# Altium PCB ver061.PcbDoc
Units mm, origin at the board's own origin, x right, y up, seen from the top; angles counter-clockwise.
Board outline 40 x 40 mm, 4 copper layers (ASIG, GND1, GND2, PWR/DSIG), stack 1.569 mm thick; 98 components, 55 nets, 306 pads, 381 vias.
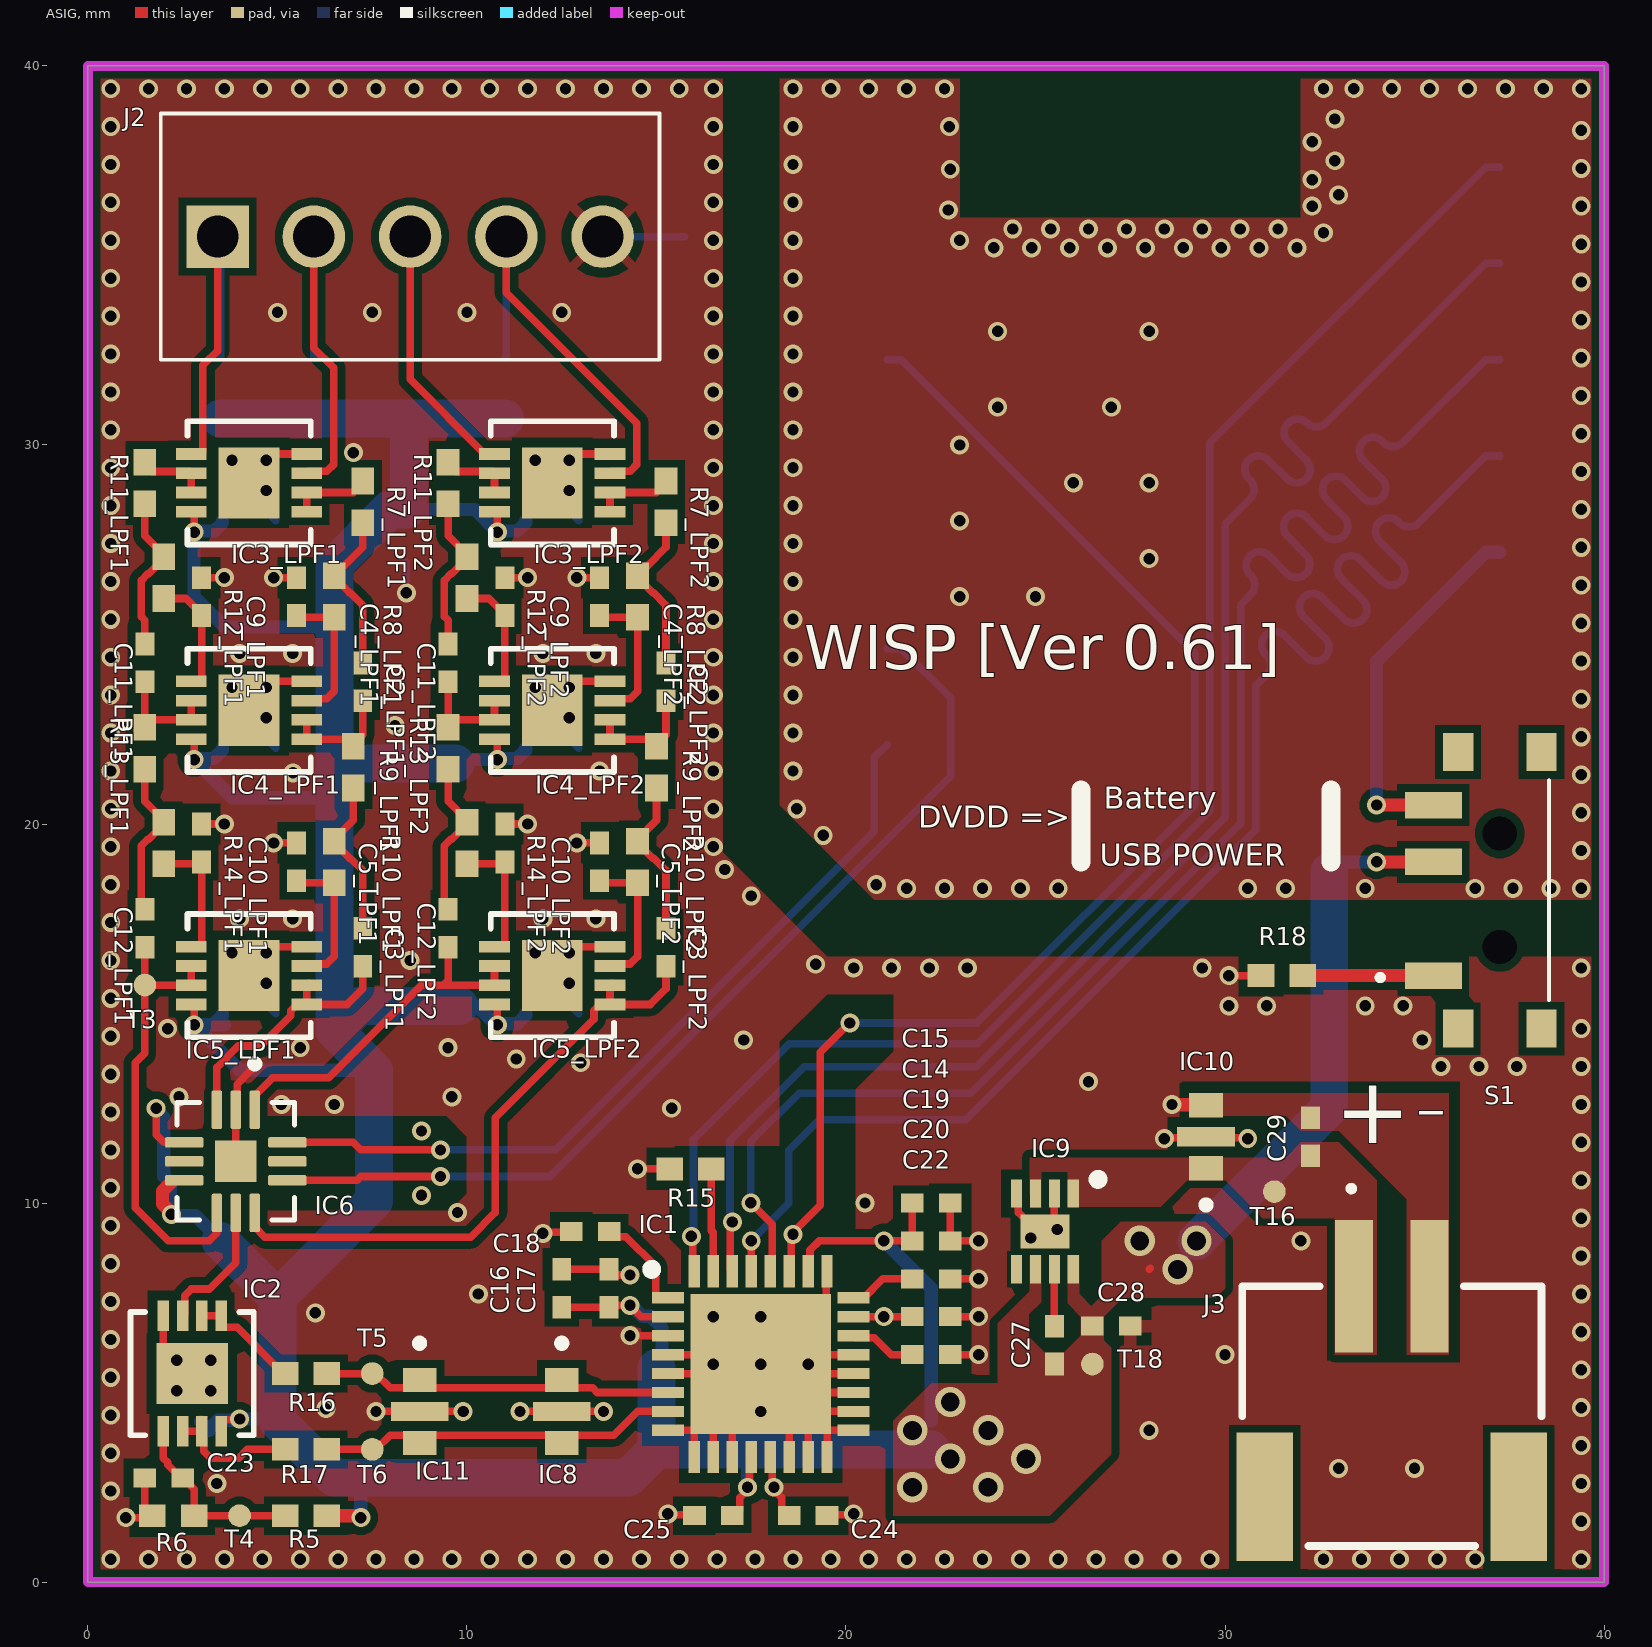
[diagram p0: ASIG view]
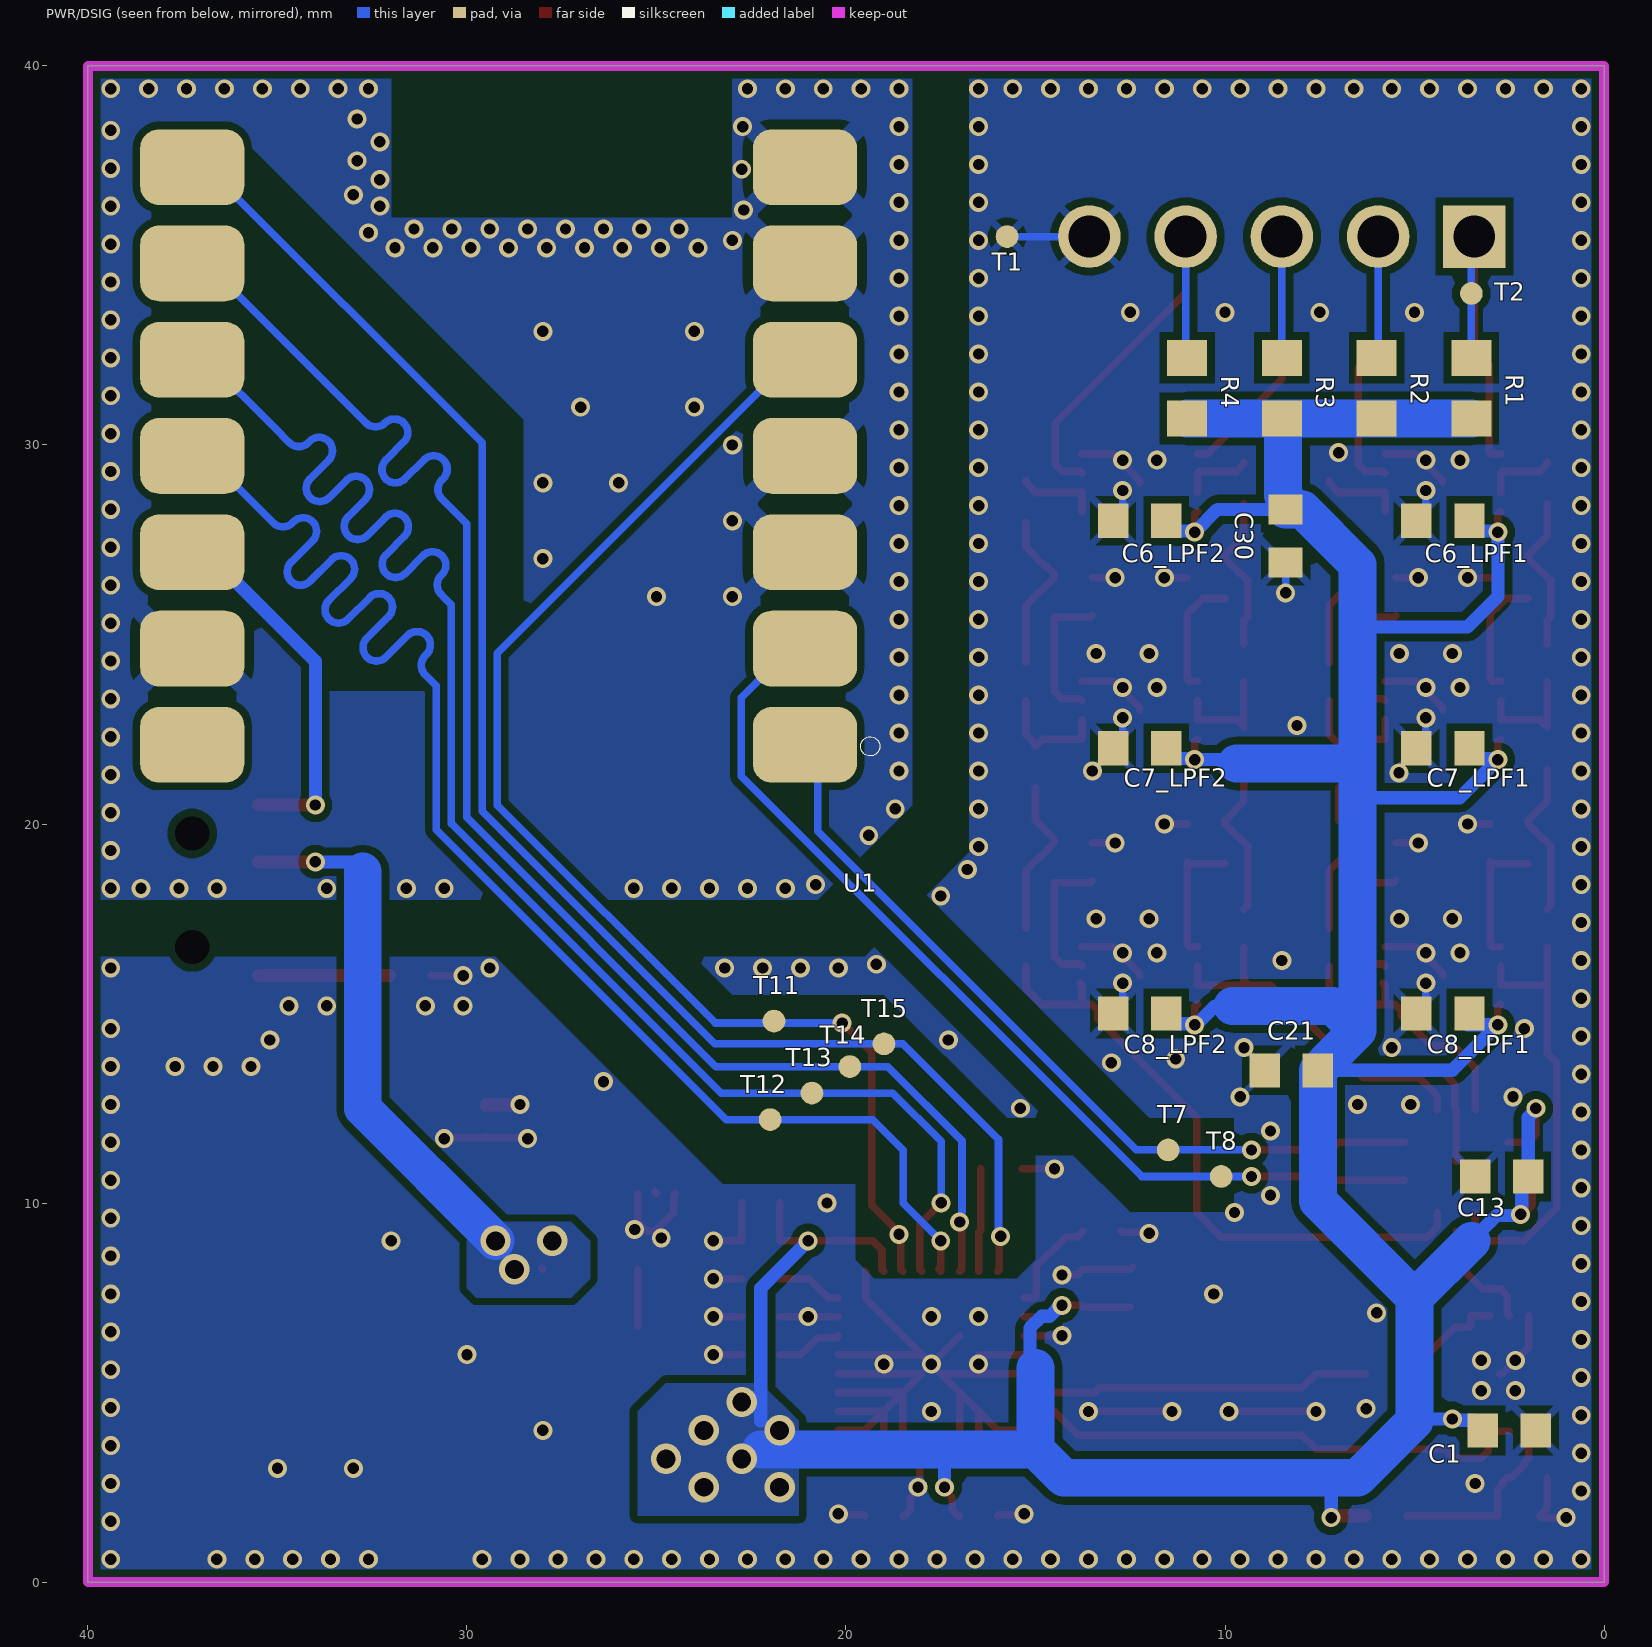
[diagram p1: PWR/DSIG view, seen from below]
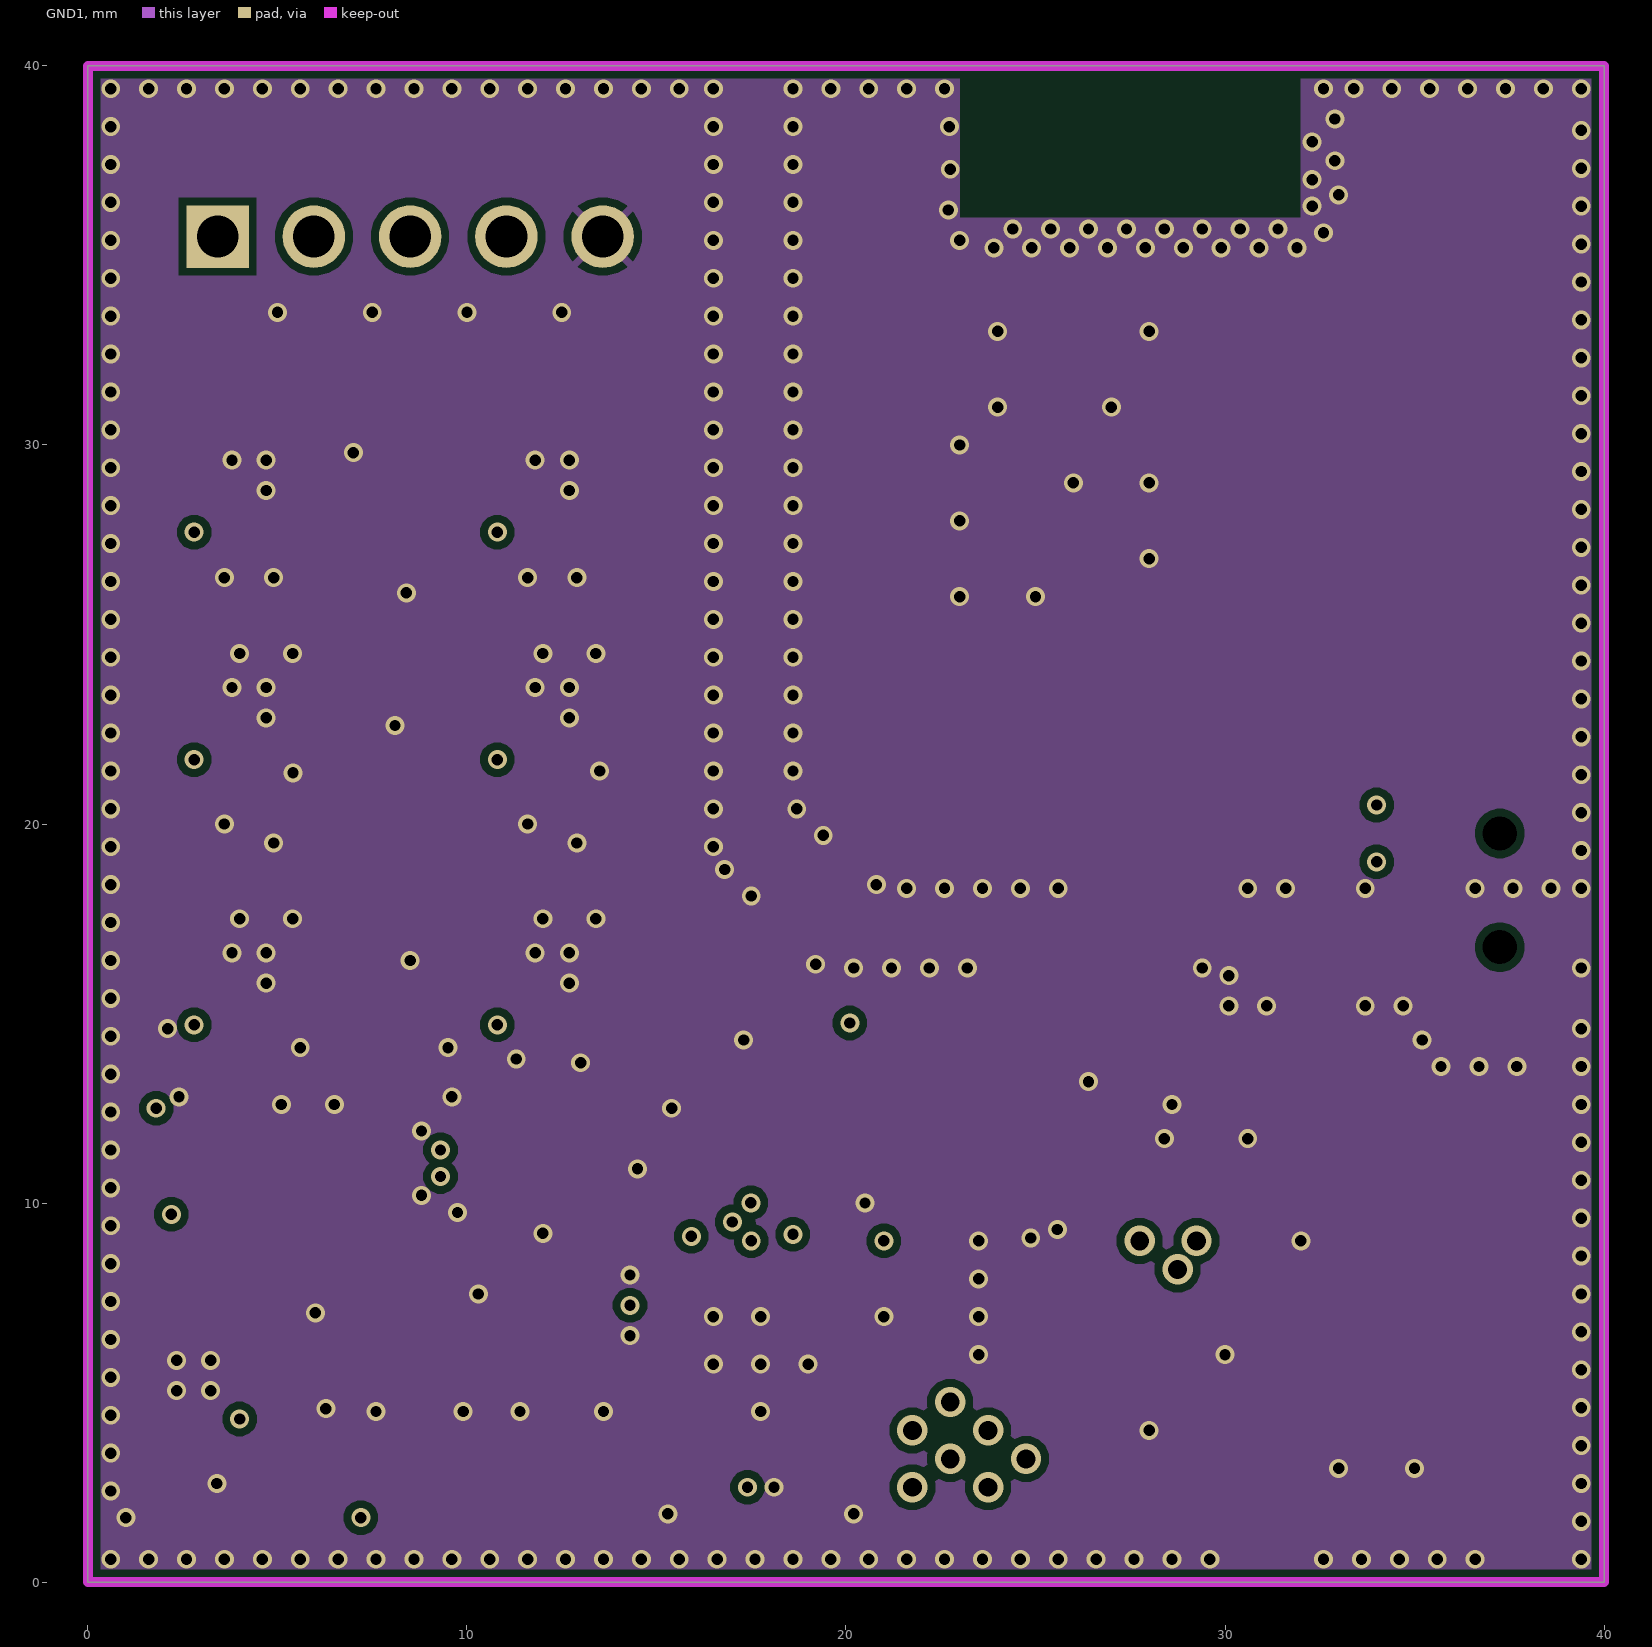
[diagram p2: GND1]
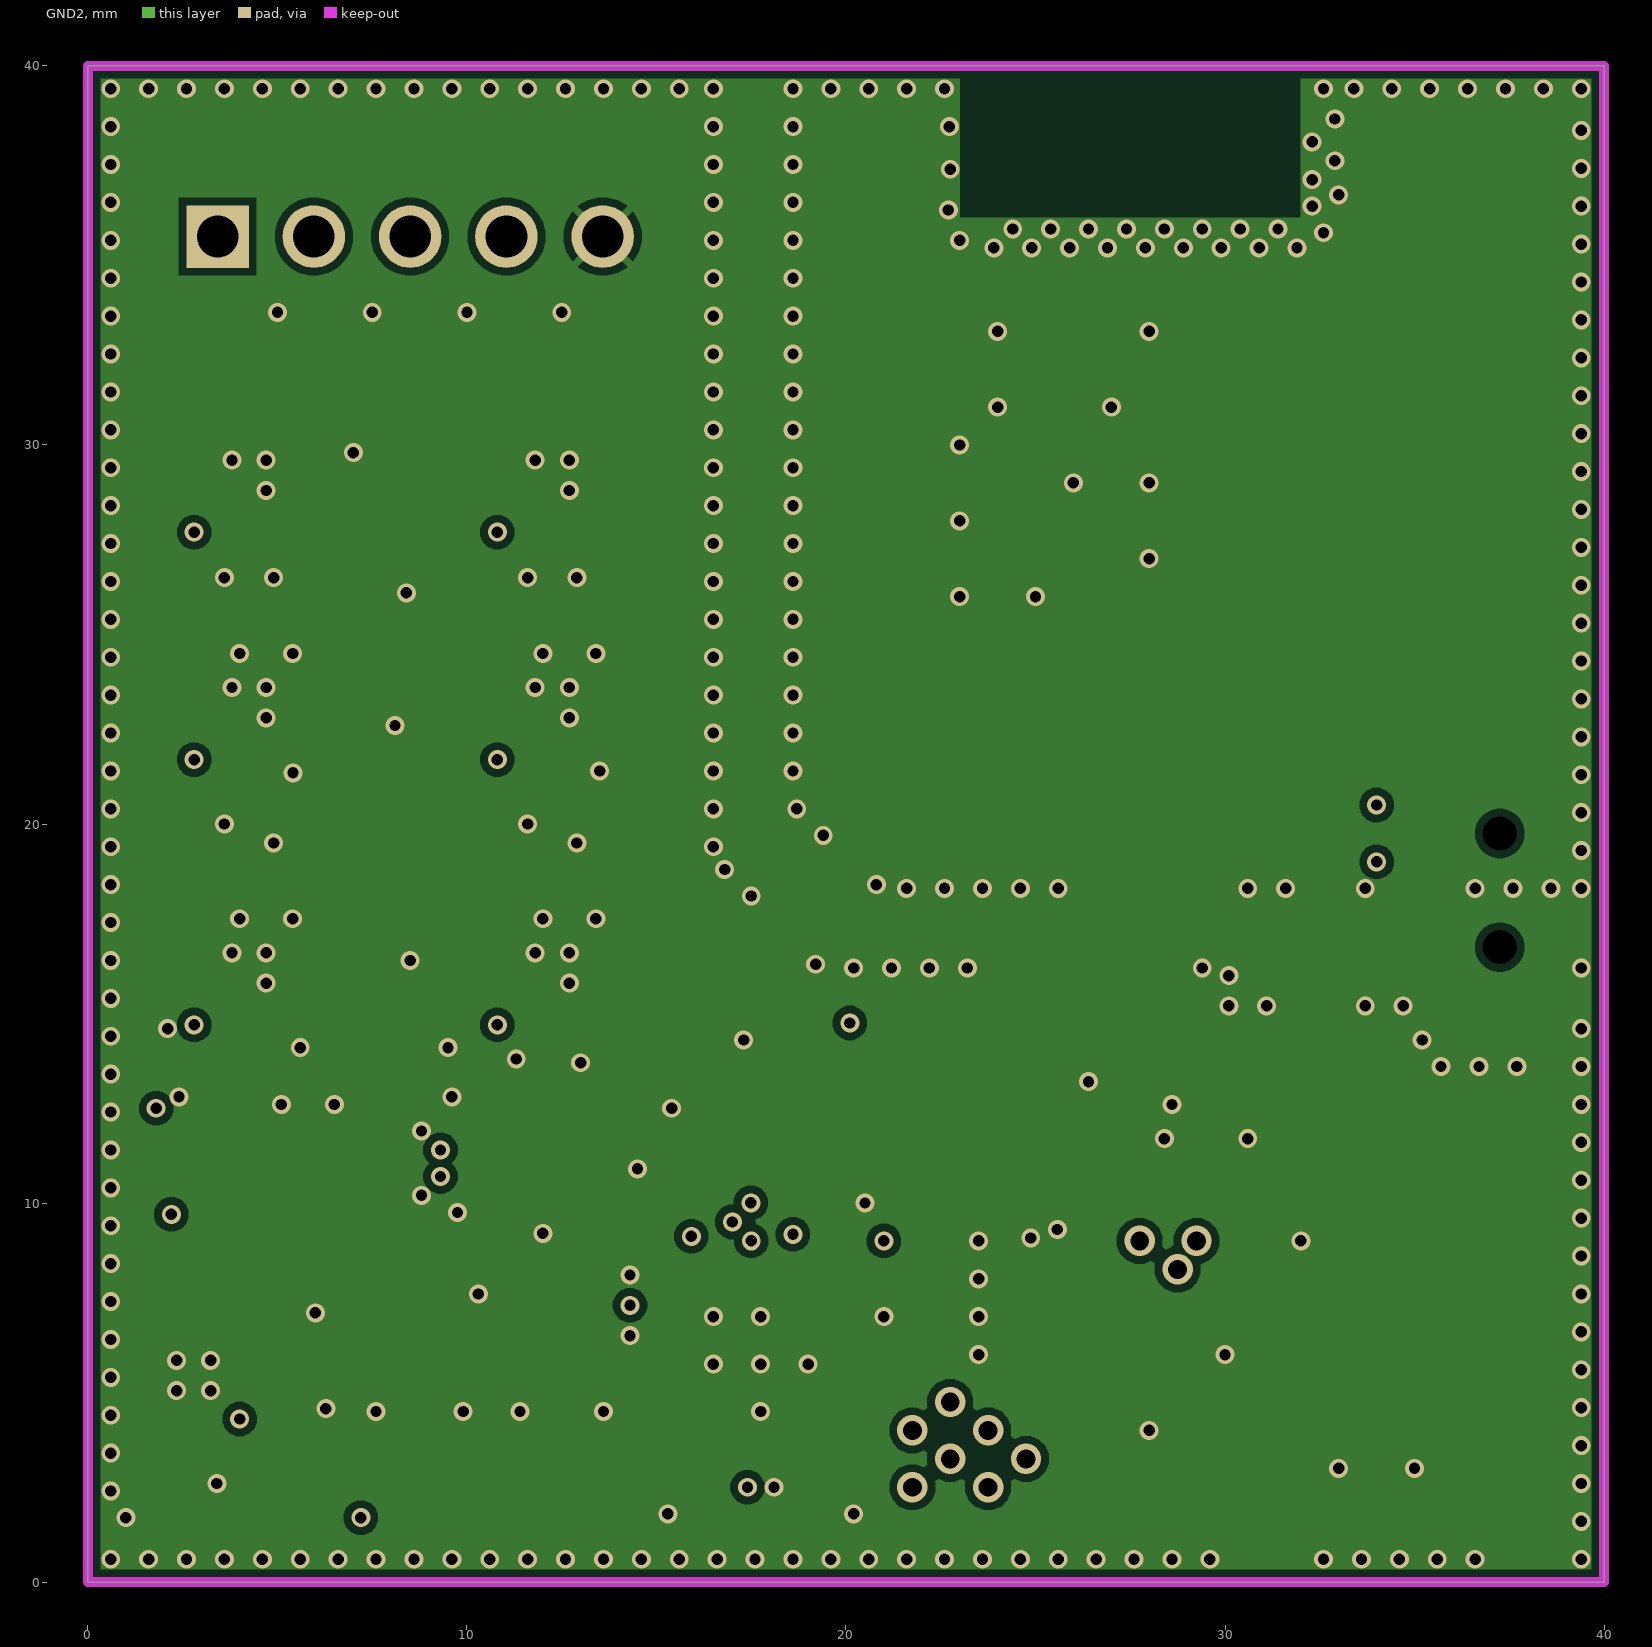
[diagram p3: GND2]
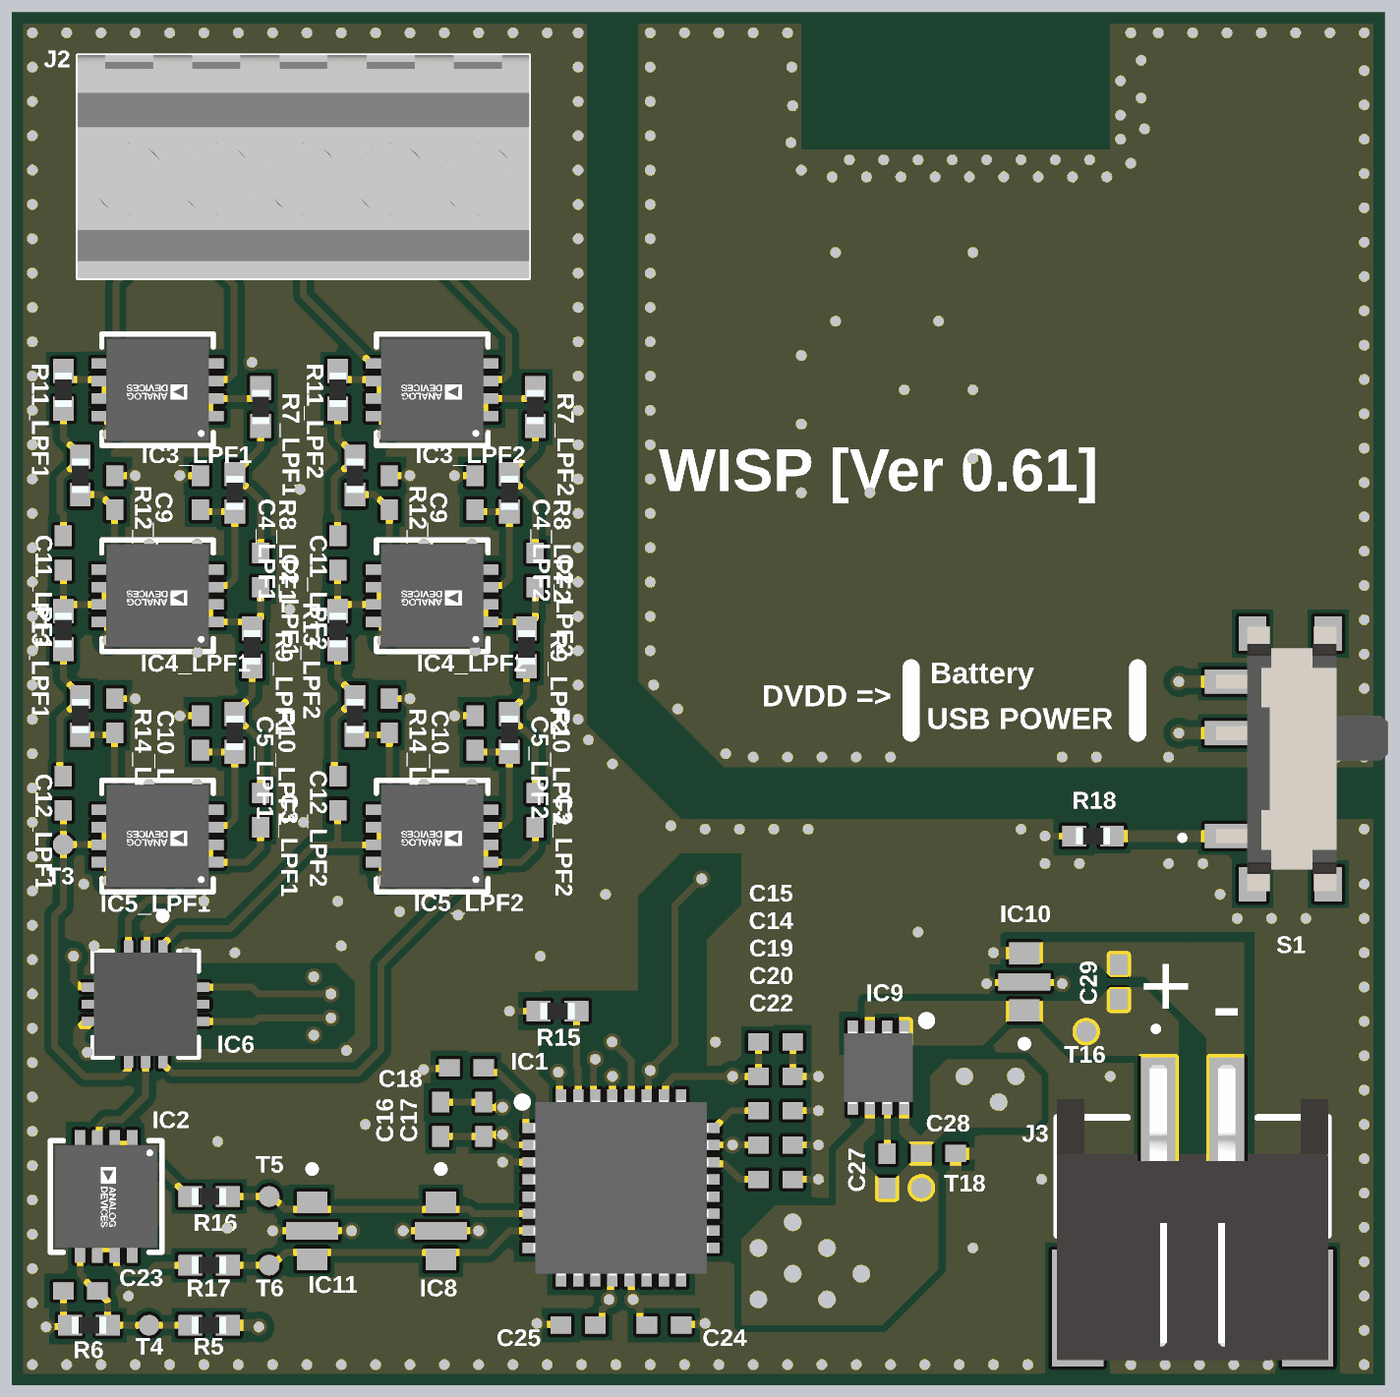
[diagram p4: 3D render of the assembled board from above, using the file's embedded part models]

## Layer stack, top to bottom
Top Solder: solder mask 0.02, Solder Resist, Dk 3.8
ASIG: signal copper 0.035
Dielectric 2: prepreg 0.0994, JLC3313, Dk 4.05
GND1: signal copper 0.0175
Dielectric 1: dielectric 1.265, CORE, Dk 4.6
GND2: signal copper 0.0175
Dielectric 3: prepreg 0.0994, JLC3313, Dk 4.05
PWR/DSIG: signal copper 0.035
Bottom Solder: solder mask 0.02, Solder Resist, Dk 3.8

## Board outline
0,0 40,0 40,40 0,40

## Design rules (kind name [scope] priority, off if disabled: settings)
Clearance Clearance_4 [HasFootprint('500X14W102MV4T') vs HasFootprint('TP_SMT_Round_0.6x0.6')] p1: gap=0.01 ignorepadtopadclearanceinfootprint=TRUE
Clearance Clearance_3 [IsVia and InNet('GND')] p2: gap=0.15 ignorepadtopadclearanceinfootprint=TRUE except(0.01: Arc-Text Track-Text SMDPad-Text THPad-Text Via-Text Fill-Text Poly-Text Region-Text Text-Text)
Clearance Clearance_2 [OnLayer('ASIG') vs HasFootprint('SON50P200X200X80-9N-D')] p3: gap=0.1 ignorepadtopadclearanceinfootprint=TRUE
Clearance Clearance_1 [InNet('AVCC_3V3_raw')] p4: gap=0.2 ignorepadtopadclearanceinfootprint=TRUE except(0.5: Arc-Fill Arc-Poly Arc-Region Track-Fill Track-Poly Track-Region SMDPad-Fill SMDPad-Poly SMDPad-Region THPad-THPad THPad-Fill THPad-Poly THPad-Region Via-Via Via-Fill Via-Poly Via-Region Fill-Fill Fill-Poly Fill-Region Poly-Poly Poly-Region Region-Region)
Clearance [All] p5: gap=0.2 ignorepadtopadclearanceinfootprint=TRUE except(0.01: Arc-Text Track-Text SMDPad-Text THPad-Text Via-Text Fill-Text Poly-Text Region-Text Text-Text)
ComponentClearance [All] p1: gap=0.01 collisioncheckmode=3 verticalgap=0.01 showdistances=FALSE donotcheckwithout3dbody=TRUE
DiffPairsRouting [All] p1: maxlimit=2.5 minlimit=0.1 mostfreqgap=0.75 toplayer_minwidth=0.2 toplayer_maxwidth=0.5 toplayer_prefwidth=0.25 midlayer1_minwidth=0.2 midlayer1_maxwidth=0.5 midlayer1_prefwidth=0.25 midlayer2_minwidth=0.2 midlayer2_maxwidth=0.5 midlayer2_prefwidth=0.25 bottomlayer_minwidth=0.2 bottomlayer_maxwidth=0.5 bottomlayer_prefwidth=0.25 maxuncoupledlength=12.7
HoleSize [All] p1: absolutevalues=TRUE maxlimit=3.5 minlimit=0.3 maxpercent=80.000 minpercent=20.000
MinimumSolderMaskSliver [All] p1: minsoldermaskwidth=0.01
PlaneClearance [All] p1: clearance=0.2
PlaneConnect [All] p1: planeconnectstyle=Direct reliefexpansion=0.5 reliefentries=4 reliefconductorwidth=0.35 reliefairgap=0.2
PolygonConnect PolygonConnect_6 [HasFootprint('MOUDLE16P-SMD-2-54-21X17-8MM') vs IsNamedPolygon('GND_L04_P008')] p1: connectstyle=Relief reliefconductorwidth=0.5 reliefentries=4 polygonreliefangle="45 Angle" airgapwidth=0.254
PolygonConnect PolygonConnect_5 [InComponent('C28') vs InNet('GND')] p2: connectstyle=Relief reliefconductorwidth=0.35 reliefentries=4 polygonreliefangle="90 Angle" airgapwidth=0.254
PolygonConnect PolygonConnect_3 [All vs IsNamedPolygon('GND_L01_P010')] p3: thpad.connectstyle=Relief thpad.reliefconductorwidth=0.254 thpad.reliefentries=4 thpad.polygonreliefangle="45 Angle" thpad.airgapwidth=0.254 smdpad.connectstyle=NoConnect smdpad.reliefconductorwidth=0.254 smdpad.reliefentries=4 smdpad.polygonreliefangle="90 Angle" smdpad.airgapwidth=0.254 via.connectstyle=Direct via.reliefconductorwidth=0.254 via.reliefentries=4 via.polygonreliefangle="90 Angle" via.airgapwidth=0.254
PolygonConnect PolygonConnect_4 [All vs IsNamedPolygon('3V3_L01_P005') Or IsNamedPolygon('GND_L01_P003') Or IsNamedPolygon('NetC29_1_L01_P004')] p4: connectstyle=Direct reliefconductorwidth=0.254 reliefentries=4 polygonreliefangle="90 Angle" airgapwidth=0.254
PolygonConnect PolygonConnect_1 [isVia] p5: connectstyle=Direct reliefconductorwidth=0.254 reliefentries=4 polygonreliefangle="90 Angle" airgapwidth=0.254
PolygonConnect PolygonConnect_2 [InNet('3V3')] p6: connectstyle=Relief reliefconductorwidth=0.35 reliefentries=4 polygonreliefangle="45 Angle" airgapwidth=0.2
PolygonConnect [All] p7: connectstyle=Relief reliefconductorwidth=0.2 reliefentries=4 polygonreliefangle="45 Angle" airgapwidth=0.2
RoomDefinition LPF1 [InComponentClass('LPF1')] p1: confinementstyle=ConfineIn formatcopy=TRUE lockcomponents=FALSE outline 0.5,14.25 8,14.25 8,31 0.5,31
RoomDefinition LPF2 [InComponentClass('LPF2')] p2: confinementstyle=ConfineIn formatcopy=TRUE lockcomponents=FALSE outline 8.5,14.25 16,14.25 16,31 8.5,31
RoutingVias [All] p1: holewidth=0.3 width=0.5 viastyle="Through Hole" minholewidth=0.3 minwidth=0.5 maxholewidth=0.6 maxwidth=1
SilkToSilkClearance [All] p1: silktosilkclearance=0.01
SilkToSolderMaskClearance [IsPad] p1: minsilkscreentomaskgap=0.01 clearancetoexposedcopper=TRUE
SolderMaskExpansion SolderMaskExpansion_1 [IsVia] p1: expansion=0.01 istentingtop=TRUE
SolderMaskExpansion [All] p2: expansion=0.102 istentingtop=FALSE
UnRoutedNet [All] p1: checkbadconnections=TRUE
Width Width_1 [InNet('3V3')] p1: maxlimit=1 minlimit=0.2 preferedwidth=0.35
Width [All] p2: maxlimit=1 minlimit=0.2 preferedwidth=0.2
21 further rules are at their usual default settings.

## Classes and differential pairs
channel class ver061_LPF: LPF1 LPF2
net class out_2[1..2]: out_21 out_22
net class out_1[1..2]: out_11 out_12
net class lpf_in_p2[1..2]: lpf_in_p21 lpf_in_p22
net class lpf_in_p1[1..2]: lpf_in_p11 lpf_in_p12
component class Signal_Analog: C13 C21 C23 C30 IC6 J2 R1 R2 R3 R4 R5 R6 T1 T2 T3 T4
component class Power: C27 C28 C29 IC9 IC10 J3 T16 T18
component class "MCU (SPI_master)": R18 S1 T7 T8 T11 T12 T13 T14 T15 U1
component class LPF2: C2_LPF2 C3_LPF2 C4_LPF2 C5_LPF2 C6_LPF2 C7_LPF2 C8_LPF2 C9_LPF2 C10_LPF2 C11_LPF2 C12_LPF2 IC3_LPF2 IC4_LPF2 IC5_LPF2 R7_LPF2 R8_LPF2 R9_LPF2 R10_LPF2 R11_LPF2 R12_LPF2 R13_LPF2 R14_LPF2
component class LPF1: C2_LPF1 C3_LPF1 C4_LPF1 C5_LPF1 C6_LPF1 C7_LPF1 C8_LPF1 C9_LPF1 C10_LPF1 C11_LPF1 C12_LPF1 IC3_LPF1 IC4_LPF1 IC5_LPF1 R7_LPF1 R8_LPF1 R9_LPF1 R10_LPF1 R11_LPF1 R12_LPF1 R13_LPF1 R14_LPF1
component class "ADC (SPI_slave)": C1 C14 C15 C16 C17 C18 C19 C20 C22 C24 C25 IC1 IC2 IC8 IC11 R15 R16 R17 T5 T6
differential pair Vin: +Vin_P -Vin_N
differential pair Vbuff: +Vbuff_P -Vbuff_N
differential pair Vbuff_1: +Vbuff_1_P -Vbuff_1_N

## Components (designator, comment, footprint, x,y, rotation, side; value= is the part's Value field where it differs from the comment)
C1 "Cap Semi" 1608[0603] 2.5,4 r180 bottom value=100nF
C2_LPF1 "Cap Semi" 0402 7.25,23.75 r270 top value=220nF (schematic designator C2)
C2_LPF2 "Cap Semi" 0402 15.25,23.75 r270 top value=220nF (schematic designator C2)
C3_LPF1 "Cap Semi" 0402 7.25,16.75 r270 top value=100nF (schematic designator C3)
C3_LPF2 "Cap Semi" 0402 15.25,16.75 r270 top value=100nF (schematic designator C3)
C4_LPF1 "Cap Semi" 0402 5.5,26 r270 top value=22nF (schematic designator C4)
C4_LPF2 "Cap Semi" 0402 13.5,26 r270 top value=22nF (schematic designator C4)
C5_LPF1 "Cap Semi" 0402 5.5,19 r270 top value=2.2nF (schematic designator C5)
C5_LPF2 "Cap Semi" 0402 13.5,19 r270 top value=2.2nF (schematic designator C5)
C6_LPF1 "Cap Semi" 1608[0603] 4.25,28 r180 bottom value=100nF (schematic designator C6)
C6_LPF2 "Cap Semi" 1608[0603] 12.25,28 r180 bottom value=100nF (schematic designator C6)
C7_LPF1 "Cap Semi" 1608[0603] 4.25,22 r180 bottom value=100nF (schematic designator C7)
C7_LPF2 "Cap Semi" 1608[0603] 12.25,22 r180 bottom value=100nF (schematic designator C7)
C8_LPF1 "Cap Semi" 1608[0603] 4.25,15 r180 bottom value=100nF (schematic designator C8)
C8_LPF2 "Cap Semi" 1608[0603] 12.25,15 r180 bottom value=100nF (schematic designator C8)
C9_LPF1 "Cap Semi" 0402 3,26 r270 top value=22nF (schematic designator C9)
C9_LPF2 "Cap Semi" 0402 11,26 r270 top value=22nF (schematic designator C9)
C10_LPF1 "Cap Semi" 0402 3,19.5 r270 top value=2.2nF (schematic designator C10)
C10_LPF2 "Cap Semi" 0402 11,19.5 r270 top value=2.2nF (schematic designator C10)
C11_LPF1 "Cap Semi" 0402 1.5,24.25 r270 top value=220nF (schematic designator C11)
C11_LPF2 "Cap Semi" 0402 9.5,24.25 r270 top value=220nF (schematic designator C11)
C12_LPF1 "Cap Semi" 0402 1.5,17.25 r270 top value=100nF (schematic designator C12)
C12_LPF2 "Cap Semi" 0402 9.5,17.25 r270 top value=100nF (schematic designator C12)
C13 "Cap Semi" 1608[0603] 2.7,10.7 r180 bottom value=100nF
C14 "Cap Semi" 0402 22.25,9 r0 top value=100nF
C15 "Cap Semi" 0402 22.25,10 r0 top value=1uF
C16 "Cap Semi" 0402 12.5,7.75 r90 top value=1uF
C17 "Cap Semi" 0402 13.75,7.75 r90 top value=100nF
C18 "Cap Semi" 0402 13.25,9.25 r180 top value=100nF
C19 "Cap Semi" 0402 22.25,8 r0 top value=100nF
C20 "Cap Semi" 0402 22.25,7 r180 top value=100nF
C21 "Cap Semi" 1608[0603] 8.25,13.5 r180 bottom value=1uF
C22 "Cap Semi" 0402 22.25,6 r0 top value=100nF
C23 "Cap Semi" 0402 2,2.75 r0 top value=1uF
C24 "Cap Semi" 0402 19,1.75 r180 top value=100nF
C25 "Cap Semi" 0402 16.5,1.75 r180 top value=100nF
C27 "Cap Semi" 0402 25.5,6.25 r90 top value=10nF
C28 "Cap Semi" 0402 27,6.75 r0 top value=4.7uF
C29 "Cap Semi" 0402 32.25,11.75 r90 top value=4.7uF
C30 "Cap Semi" 1608[0603] 8.4,27.6 r90 bottom value=1uF
IC1 "AD7124-8BBCPZ-RL7" QFN50P500X500X100-33N-D 17.75,5.75 r0 top
IC2 "ADA4051-2ACPZ-R7" DFN300X300X90-9N 2.75,5.5 r270 top
IC3_LPF1 "ADA4051-2ACPZ-R7" DFN300X300X90-9N 4.25,29 r180 top (schematic designator IC3)
IC3_LPF2 "ADA4051-2ACPZ-R7" DFN300X300X90-9N 12.25,29 r180 top (schematic designator IC3)
IC4_LPF1 "ADA4051-2ACPZ-R7" DFN300X300X90-9N 4.25,23 r180 top (schematic designator IC4)
IC4_LPF2 "ADA4051-2ACPZ-R7" DFN300X300X90-9N 12.25,23 r180 top (schematic designator IC4)
IC5_LPF1 "ADA4051-2ACPZ-R7" DFN300X300X90-9N 4.25,16 r180 top (schematic designator IC5)
IC5_LPF2 "ADA4051-2ACPZ-R7" DFN300X300X90-9N 12.25,16 r180 top (schematic designator IC5)
IC6 "MAX4734ETC+T" QFN50P300X300X80-13N 3.9,11.1 r270 top
IC8 "X2Y Cap 100nF" 500X14W102MV4T 12.5,4.5 r270 top
IC9 "MAX38902AATA+T" SON50P200X200X80-9N-D 25.25,9.25 r270 top
IC10 "X2Y Cap 10pF" 500X14W102MV4T 29.5,11.75 r90 top
IC11 "X2Y Cap 10pF" 500X14W102MV4T 8.75,4.5 r270 top
J2 "282834-5" 2828345 3.42,35.5 r0 top
J3 "1769" 1769 34.4,7.8 r0 top
R1 "Res3" RESC1608X55N 3.5,31.5 r90 bottom value=51K
R2 "Res3" RESC1608X55N 6,31.5 r90 bottom value=51K
R3 "Res3" RESC1608X55N 8.5,31.5 r90 bottom value=51K
R4 "Res3" RESC1608X55N 11,31.5 r90 bottom value=51K
R5 "Res3" RESC1005X35N 5.75,1.75 r0 top value=51K
R6 "Res3" RESC1005X35N 2.25,1.75 r0 top value=51K
R7_LPF1 "Res3" RESC1005X35N 7.25,28.5 r90 top value=68K (schematic designator R7)
R7_LPF2 "Res3" RESC1005X35N 15.25,28.5 r90 top value=68K (schematic designator R7)
R8_LPF1 "Res3" RESC1005X35N 6.5,26 r90 top value=1M (schematic designator R8)
R8_LPF2 "Res3" RESC1005X35N 14.5,26 r90 top value=1M (schematic designator R8)
R9_LPF1 "Res3" RESC1005X35N 7,21.5 r90 top value=680K (schematic designator R9)
R9_LPF2 "Res3" RESC1005X35N 15,21.5 r90 top value=680K (schematic designator R9)
R10_LPF1 "Res3" RESC1005X35N 6.5,19 r90 top value=680K (schematic designator R10)
R10_LPF2 "Res3" RESC1005X35N 14.5,19 r90 top value=680K (schematic designator R10)
R11_LPF1 "Res3" RESC1005X35N 1.5,29 r90 top value=68K (schematic designator R11)
R11_LPF2 "Res3" RESC1005X35N 9.5,29 r90 top value=68K (schematic designator R11)
R12_LPF1 "Res3" RESC1005X35N 2,26.5 r90 top value=1M (schematic designator R12)
R12_LPF2 "Res3" RESC1005X35N 10,26.5 r90 top value=1M (schematic designator R12)
R13_LPF1 "Res3" RESC1005X35N 1.5,22 r90 top value=680K (schematic designator R13)
R13_LPF2 "Res3" RESC1005X35N 9.5,22 r90 top value=680K (schematic designator R13)
R14_LPF1 "Res3" RESC1005X35N 2,19.5 r90 top value=680K (schematic designator R14)
R14_LPF2 "Res3" RESC1005X35N 10,19.5 r90 top value=680K (schematic designator R14)
R15 "Res3" RESC1005X35N 15.9,10.9 r180 top value=10K
R16 "Res3" RESC1005X35N 5.75,5.5 r180 top value=1K
R17 "Res3" RESC1005X35N 5.75,3.5 r180 top value=1K
R18 "Res3" RESC1005X35N 31.5,16 r180 top value=10K
S1 "PCM12SMTR" PCM12SMTR 37.25,18.25 r90 top
T1 "TP_SMT" TP_SMT_Round_0.6x0.6 15.75,35.5 r180 bottom
T2 "TP_SMT" TP_SMT_Round_0.6x0.6 3.5,34 r180 bottom
T3 "TP_SMT" TP_SMT_Round_0.6x0.6 1.5,15.75 r0 top
T4 "TP_SMT" TP_SMT_Round_0.6x0.6 4,1.75 r270 top
T5 "TP_SMT" TP_SMT_Round_0.6x0.6 7.5,5.5 r0 top
T6 "TP_SMT" TP_SMT_Round_0.6x0.6 7.5,3.5 r0 top
T7 "TP_SMT" TP_SMT_Round_0.6x0.6 11.5,11.4 r180 bottom
T8 "TP_SMT" TP_SMT_Round_0.6x0.6 10.1,10.7 r180 bottom
T11 "TP_SMT" TP_SMT_Round_0.6x0.6 21.9,14.8 r90 bottom
T12 "TP_SMT" TP_SMT_Round_0.6x0.6 22,12.2 r90 bottom
T13 "TP_SMT" TP_SMT_Round_0.6x0.6 20.9,12.9 r90 bottom
T14 "TP_SMT" TP_SMT_Round_0.6x0.6 19.9,13.6 r90 bottom
T15 "TP_SMT" TP_SMT_Round_0.6x0.6 19,14.2 r90 bottom
T16 "TP_SMT" TP_SMT_Round_0.6x0.6 31.3,10.3 r90 top
T18 "TP_SMT" TP_SMT_Round_0.6x0.6 26.5,5.75 r90 top
U1 "MOUDLE-SEEEDUINO-XIAO-NRF52840-SMD" MOUDLE16P-SMD-2-54-21X17-8MM 20.25,40.21 r0 bottom

## Footprints (in the part's own frame and the unit in brackets; to place one, negate y for a bottom-side part, rotate by r counter-clockwise, add the part's x,y. Pads: shape width x height; smd on the part's side, far side on the other; paste and mask are expansions set on the pad)
0402 [mm] "Chip Capacitor, Body 1.0x0.5mm, IPC High Density"
  rect 0.6x0.5 smd: 1(-0.5,0) 2(0.5,0)
  body extent -0.55,-0.3 0.55,0.3, height 1.3
500X14W102MV4T [mm]
  rect 0.64x0.89 smd: A1(-0.83,0) B1(0.83,0)
  rect 0.51x1.52 smd: G1(0,0)
  silkscreen extent -1.9,-0.1 -1.7,0.1
1608[0603] [mm] "Chip Capacitor, Body 1.6x0.8mm, IPC High Density"
  rect 0.8x0.9 smd: 1(-0.7,0) 2(0.7,0)
  body extent -0.87,-0.48 0.87,0.48, height 1.3
1769 [mm]
  rect 1x3.5 smd: 1(-1,0) 2(1,0)
  rect 1.5x3.4 smd: 3(-3.35,-5.55) 4(3.35,-5.55)
  silkscreen extent -3.95,-6.85 3.95,2.63, body extent -3.95,-7.07 3.95,1.53, height 4.8
2828345 [mm]
  rect 1.65x1.65 hole 1.1: 1(0,0)
  round 1.65 hole 1.1: 2(2.54,0) 3(5.08,0) 4(7.62,0) 5(10.16,0)
  silkscreen extent -1.5,-3.25 11.66,3.25, body extent -1.5,-3.25 11.66,3.25, height 9.7
DFN300X300X90-9N [mil]
  rect 32x12 smd: 1(-60,30) 2(-60,10) 3(-60,-10) 4(-60,-30) 5(60,-30) 6(60,-10) 7(60,10) 8(60,30)
  rect 63x74 smd: 9(0,0)
  silkscreen extent -64,-64 64,64, body extent -59,-59 59,59, height 32
MOUDLE16P-SMD-2-54-21X17-8MM [mm]
  rrect50% 2.75x2 smd: 1(0.835,18.12) 2(0.835,15.58) 3(0.835,13.04) 4(0.835,10.5) 5(0.835,7.96) 6(0.835,5.42) 7(0.835,2.88) 8(17,2.88) 9(17,5.42) 10(17,7.96) 11(17,10.5) 12(17,13.04) 13(17,15.58) 14(17,18.12)
  silkscreen extent -1.14,17.91 -0.64,18.41
PCM12SMTR [mm]
  rect 0.7x1.5 smd: 1(-2.25,1.75) 2(0.75,1.75) 3(2.25,1.75)
  round 0.45 hole 0.9 unplated: MH1(-1.5,0) MH2(1.5,0)
  rect 1x0.8 smd: MP1(-3.65,1.1) MP2(-3.65,-1.1) MP3(3.65,-1.1) MP4(3.65,1.1)
  silkscreen extent -2.9,-1.3 2.9,3.2, body extent -3.85,-2.84 3.85,2.16, height 1.41
QFN50P300X300X80-13N [mm]
  rrect25% 1.01x0.27 smd: 1(-1.36,0.5) 2(-1.36,0) 3(-1.36,-0.5) 7(1.36,-0.5) 8(1.36,0) 9(1.36,0.5)
  rrect25% 0.27x1.01 smd: 4(-0.5,-1.36) 5(0,-1.36) 6(0.5,-1.36) 10(0.5,1.36) 11(0,1.36) 12(-0.5,1.36)
  rect 1.1x1.1 smd paste-0.2: 13(0,0)
  silkscreen extent -2.67,-1.55 1.55,1.55, body extent -1.5,-1.5 1.5,1.5, height 0.8
QFN50P500X500X100-33N-D [mm]
  rect 0.85x0.3 smd: 1(-2.45,1.75) 2(-2.45,1.25) 3(-2.45,0.75) 4(-2.45,0.25) 5(-2.45,-0.25) 6(-2.45,-0.75) 7(-2.45,-1.25) 8(-2.45,-1.75) 17(2.45,-1.75) 18(2.45,-1.25) 19(2.45,-0.75) 20(2.45,-0.25) 21(2.45,0.25) 22(2.45,0.75) 23(2.45,1.25) 24(2.45,1.75)
  rect 0.3x0.85 smd: 9(-1.75,-2.45) 10(-1.25,-2.45) 11(-0.75,-2.45) 12(-0.25,-2.45) 13(0.25,-2.45) 14(0.75,-2.45) 15(1.25,-2.45) 16(1.75,-2.45) 25(1.75,2.45) 26(1.25,2.45) 27(0.75,2.45) 28(0.25,2.45) 29(-0.25,2.45) 30(-0.75,2.45) 31(-1.25,2.45) 32(-1.75,2.45)
  rect 3.7x3.7 smd: 33(0,0)
  silkscreen extent -3,2.38 -2.75,2.62, body extent -2.55,-2.55 2.55,2.55, height 1
RESC1005X35N [mm]
  rect 0.7x0.6 smd: 1(-0.55,0) 2(0.55,0)
  body extent -0.5,-0.25 0.5,0.25, height 0.35
RESC1608X55N [mm]
  rect 0.95x1.05 smd: 1(-0.8,0) 2(0.8,0)
  body extent -0.8,-0.41 0.8,0.41, height 0.55
SON50P200X200X80-9N-D [mm]
  rect 0.75x0.3 smd: 1(-1,0.75) 2(-1,0.25) 3(-1,-0.25) 4(-1,-0.75) 5(1,-0.75) 6(1,-0.25) 7(1,0.25) 8(1,0.75)
  rect 0.9x1.3 smd: 9(0,0)
  silkscreen extent -1.5,1.28 -1.25,1.53, body extent -1.05,-1 1.05,1, height 0.8
TP_SMT_Round_0.6x0.6 [mm]
  round 0.6 smd: 1(0,0)

## Part data
C1 C2_LPF1 C2_LPF2 C3_LPF1 C3_LPF2 C4_LPF1 C4_LPF2 C5_LPF1 C5_LPF2 C6_LPF1 C6_LPF2 C7_LPF1 C7_LPF2 C8_LPF1 C8_LPF2 C9_LPF1 C9_LPF2 C10_LPF1 C10_LPF2 C11_LPF1 C11_LPF2 C12_LPF1 C12_LPF2 C13 C14 C15 C16 C17 C18 C19 C20 C21 C22 C23 C24 C25 C27 C28 C29 C30: "Capacitor (Semiconductor SIM Model)", LatestRevisionDate=29-May-2009, LatestRevisionNote="IPC-7351 Footprint Added.", PackageDescription="Chip Capacitor", PackageReference=C1206, Published=8-Jun-2000, Publisher="Altium Limited"
IC1: "Integrated Circuit", Manufacturer_Name="Analog Devices", Mouser Part Number=584-AD7124-8BBCPZRL7, Arrow Part Number=AD7124-8BBCPZ-RL7, Arrow Price/Stock=https://www.arrow.com/en/products/ad7124-8bbcpz-rl7/analog-devices?region=nac, Datasheet Link=https://www.analog.com/media/en/technical-documentation/data-sheets/ad7124-8.pdf, Height=1mm, Manufacturer_Part_Number=AD7124-8BBCPZ-RL7, Mouser Price/Stock=https://www.mouser.co.uk/ProductDetail/Analog-Devices/AD7124-8BBCPZ-RL7?qs=wUXugUrL1qzAxcMt7nmw0w%3D%3D
IC2 IC3_LPF1 IC3_LPF2 IC4_LPF1 IC4_LPF2 IC5_LPF1 IC5_LPF2: "Integrated Circuit", Manufacturer_Name="Analog Devices", Mouser Part Number=584-ADA4051-2ACPZ-R7, Arrow Part Number=ADA4051-2ACPZ-R7, Arrow Price/Stock=https://www.arrow.com/en/products/ada4051-2acpz-r7/analog-devices, Manufacturer_Part_Number=ADA4051-2ACPZ-R7, Mouser Price/Stock=https://www.mouser.co.uk/ProductDetail/Analog-Devices/ADA4051-2ACPZ-R7?qs=BpaRKvA4VqFJoopj8kXVMQ%3D%3D
IC6: "Integrated Circuit", Manufacturer_Name="Analog Devices", Mouser Part Number=700-MAX4734ETCT, Datasheet Link=https://datasheets.maximintegrated.com/en/ds/MAX4734.pdf, Height=0.8mm, Manufacturer_Part_Number=MAX4734ETC+T, Mouser Price/Stock=https://www.mouser.co.uk/ProductDetail/Analog-Devices-Maxim-Integrated/MAX4734ETC%2bT?qs=LHmEVA8xxfYMT3DtZOqchA%3D%3D
IC8 IC10 IC11: library part 500X14W102MV4T, "Integrated Circuit", Manufacturer_Name="JOHANSON TECHNOLOGY", Mouser Part Number=605-500X14W102MV4T, Datasheet Link=https://www.johansondielectrics.com/downloads/x2y-filter-and-decoupling-capacitors.pdf, Height=0.66mm, Manufacturer_Part_Number=500X14W102MV4T, Mouser Price/Stock=https://www.mouser.co.uk/ProductDetail/Johanson-Dielectrics/500X14W102MV4T?qs=yCnrNFeXz%252Bg%252BGvc939b0KQ%3D%3D
IC9: "Integrated Circuit", Manufacturer_Name="Analog Devices", Mouser Part Number=700-MAX38902AATA+T, Datasheet Link=https://media.digikey.com/pdf/Data%20Sheets/Maxim%20PDFs/MAX38902A_B_C_D_Rev4_12-6-18.pdf, Height=0.8mm, Manufacturer_Part_Number=MAX38902AATA+T, Mouser Price/Stock=https://www.mouser.co.uk/ProductDetail/Maxim-Integrated/MAX38902AATA%2bT?qs=rrS6PyfT74ceu65lHXtPmw%3D%3D
J2: "Connector", Manufacturer_Name="TE Connectivity", Mouser Part Number=571-282834-5, Arrow Part Number=282834-5, Arrow Price/Stock=https://www.arrow.com/en/products/282834-5/te-connectivity?region=nac, Datasheet Link=https://www.te.com/commerce/DocumentDelivery/DDEController?Action=showdoc&DocId=Customer+Drawing%7F282834%7FC1%7Fpdf%7FEnglish%7FENG_CD_282834_C1.pdf%7F282834-5, Height=10.3mm, Manufacturer_Part_Number=282834-5, Mouser Price/Stock=https://www.mouser.co.uk/ProductDetail/TE-Connectivity/282834-5?qs=A%252Bip%252BNCYi6PY1Kyrkp4b4w%3D%3D
J3: "Connector", Manufacturer_Name=Adafruit, Mouser Part Number=485-1769, Arrow Part Number=1769, Arrow Price/Stock=https://www.arrow.com/en/products/1769/adafruit-industries?region=nac, Datasheet Link=https://cdn-shop.adafruit.com/datasheets/17311.pdf, Manufacturer_Part_Number=1769, Mouser Price/Stock=https://www.mouser.co.uk/ProductDetail/Adafruit/1769?qs=GURawfaeGuBbgoGtf2XstA%3D%3D
R1 R2 R3 R4 R5 R6 R7_LPF1 R7_LPF2 R8_LPF1 R8_LPF2 R9_LPF1 R9_LPF2 R10_LPF1 R10_LPF2 R11_LPF1 R11_LPF2 R12_LPF1 R12_LPF2 R13_LPF1 R13_LPF2 R14_LPF1 R14_LPF2 R15 R16 R17 R18: "Resistor", LatestRevisionDate=29-May-2009, LatestRevisionNote="IPC-7351 Footprint Added.", PackageDescription="Chip Resistor", PackageReference=J1-0603, Published=8-Jun-2000, Publisher="Altium Limited"
S1: "Switch", Manufacturer_Name="C & K COMPONENTS", Mouser Part Number=611-PCM12SMTR, Arrow Part Number=PCM12SMTR, Arrow Price/Stock=https://www.arrow.com/en/products/pcm12smtr/ck?region=nac, Datasheet Link=https://www.ckswitches.com/media/1424/pcm.pdf, Height=1.4mm, Manufacturer_Part_Number=PCM12SMTR, Mouser Price/Stock=https://www.mouser.co.uk/ProductDetail/CK/PCM12SMTR?qs=mfFuHy8STfL3qrPSfCHA7w%3D%3D
U1: Package=MOUDLE16P-SMD-2.54-21X17.8MM, DeviceName=-SMD, DeviceSetName=MOUDLE-SEEEDUINO-XIAO-NRF52840, GateName_1=G$1, LibraryName=Seeed-Studio-XIAO-nRF52840-footprint-eagle, SymbolName_1=MOUDLE-SEEEDUINO-XIAO-NRF52840

## Via types
v1: diameter 0.5, hole 0.3, ASIG to PWR/DSIG, tented both sides, 371 vias
v2: diameter 0.8, hole 0.5, ASIG to PWR/DSIG, tented both sides, 10 vias

## Nets (pads, with @x,y where several pads share a name; then routed paths per layer and width w, separated by ;. In a path a pad name is that pad's centre, name@x,y a point inside that pad or via, vN(x,y) a via of type N, cw(c..) or ccw(c..) an arc to the next point about the centre after c; other vN are vias at no path point)
3V3: C1.1 C6_LPF1.2 C6_LPF2.2 C7_LPF1.2 C7_LPF2.2 C8_LPF1.2 C8_LPF2.2 C13.2 C14.1 C15.1 C16.1 C17.1 C21.2 C25.1 C27.1 C28.1 C30.2 IC1.2 IC1.12 IC1.26 IC2.8 IC3_LPF1.8 IC3_LPF2.8 IC4_LPF1.8 IC4_LPF2.8 IC5_LPF1.8 IC5_LPF2.8 IC6.4 IC6.6 IC9.6 IC9.8 R1.1 R2.1 R3.1 R4.1 R5.2 S1.2 T18.1 | length 139.6
  ASIG w0.2: v1(1.8,12.5) 1.8,11.8 2,11.6 IC6.4 ; IC5_LPF1.8 2.748,15.238 2.8,15.186 v1(2.8,14.7) ; IC4_LPF1.8 2.748,22.238 2.8,22.186 v1(2.8,21.7) ; IC3_LPF1.8 2.748,28.238 2.8,28.186 v1(2.8,27.7) ; IC2.8 3.512,4.23 3.564,4.282 3.982,4.282 v1(4,4.3) ; IC5_LPF2.8 10.748,15.238 10.8,15.186 v1(10.8,14.7) ; IC4_LPF2.8 10.748,22.238 10.8,22.186 v1(10.8,21.7) ; IC3_LPF2.8 10.748,28.238 10.8,28.186 v1(10.8,27.7) ; C16.1 C17.1 13.8,7.3 v1(14.3,7.3) 14.6,7 IC1.2 ; C25.1 17.05,1.75 17.2,1.9 17.2,2.219 17.4,2.419 v1(17.4,2.5) 17.45,2.55 17.45,3.25 IC1.12 ; IC1.26 19.05,8.25 19.05,8.749 19.301,9 v1(21,9) C14.1 C15.1 ; 28,8.25 28.025,8.275
  ASIG w0.35: v1(1.8,12.5) v1@1.829,12.471 ; v1@2.171,9.729 v1(2.2,9.7) 2.2,9.741 1.965,9.975 1.965,10.315 IC6.6@2.21,10.56 ; R5.2 7.109,1.75 7.159,1.7 v1(7.2,1.7) ; v1(34,19) S1.2
  PWR/DSIG w0.2: 17.4,3.4 17.5,3.5
  PWR/DSIG w0.35: v1(1.8,12.5) 1.8,12.459 2,12.259 C13.2 2.171,10.529 2.171,9.729 v1(2.2,9.7) 2.229,9.671 2.829,9.671 3,9.5 3.5,9 ; C1.1@2.975,4.225 C1.1 3.2,4.046 3.425,4.271 3.971,4.271 v1(4,4.3) 4.95,4.3 5,4.25 ; C8_LPF1.2@3.325,14.729 3.55,14.954 C8_LPF1.2 ; C7_LPF1.2 3.55,21.954 3.325,21.729 2.829,21.729 v1(2.8,21.7) 3.805,20.695 6.5,20.695 ; C6_LPF1.2 3.55,27.954 3.325,27.729 2.829,27.729 v1(2.8,27.7) 2.8,26 3.6,25.2 6.4,25.2 6.5,25.1 ; C8_LPF1.2@3.6,14.7 3.325,14.7 v1(2.8,14.7) 4,13.5 C21.2 7.55,13.55 7.325,13.775 7.145,13.775 7.12,13.8 ; v1(7.2,1.7) 7.2,2.7 7.25,2.75 ; C30.2 10.2,28.3 v1(10.8,27.7) 10.829,27.729 11.325,27.729 11.55,27.954 C6_LPF2.2 ; 9.7,21.6 9.8,21.7 v1(10.8,21.7) 10.829,21.729 11.325,21.729 11.55,21.954 C7_LPF2.2 ; 9.8,15.2 10.259,15.2 10.759,14.7 v1(10.8,14.7) 10.829,14.729 11.325,14.729 11.55,14.954 C8_LPF2.2 ; v1(14.3,7.3) 14.341,7.3 14.63,7.011 14.838,7.011 15.146,6.703 15.146,5.796 15,5.65 ; v1(17.4,2.5) 17.4,3.4 ; v1(21,9) 22.25,7.75 22.25,4.25 ; 32.75,18.75 33,19 v1(34,19)
  PWR/DSIG w1: 3.5,9 5,7.5 ; R1.1 R2.1 R3.1 ; 9.7,21.6 6.5,21.6 ; 9.8,15.2 7.15,15.2 6.5,14.55 ; R4.1 R3.1 ; 15,5.65 15,3.5 ; 22.25,3.5 17.5,3.5 15,3.5 ; v2(29.25,9) 32.75,12.5 32.75,18.75 ; 5,7.5 7.55,10.05 C21.2 7.185,13.865 6.5,14.55 ; 5,7.5 5,4.25 6.5,2.75 7.25,2.75 14.25,2.75 15,3.5 ; 6.5,14.55 6.5,20.695 6.5,21.6 ; 6.5,21.6 6.5,25.1 6.5,26.84 7.96,28.3 C30.2 8.4,28.6 8.475,28.675 8.475,30.675 R3.1
  other v2: 21.75,2.5 23.75,2.5 22.75,3.25 24.75,3.25 21.75,4 23.75,4 22.75,4.75 28.75,8.25 27.75,9
GND: C1.2 C4_LPF1.1 C4_LPF2.1 C5_LPF1.1 C5_LPF2.1 C6_LPF1.1 C6_LPF2.1 C7_LPF1.1 C7_LPF2.1 C8_LPF1.1 C8_LPF2.1 C9_LPF1.1 C9_LPF2.1 C10_LPF1.1 C10_LPF2.1 C13.1 C14.2 C15.2 C16.2 C17.2 C18.2 C19.2 C20.1 C20.2 C21.1 C22.2 C23.1 C24.1 C24.2 C25.2 C28.2 C29.2 C30.1 IC1.3 IC1.4 IC1.5 IC1.8 IC1.9 IC1.10 IC1.11 IC1.13 IC1.14 IC1.15 IC1.16 IC1.17 IC1.18 IC1.19 IC1.20 IC1.21 IC1.23 IC1.25 IC1.33 IC2.4 IC2.9 IC3_LPF1.4 IC3_LPF1.9 IC3_LPF2.4 IC3_LPF2.9 IC4_LPF1.4 IC4_LPF1.9 IC4_LPF2.4 IC4_LPF2.9 IC5_LPF1.4 IC5_LPF1.9 IC5_LPF2.4 IC5_LPF2.9 IC6.2 IC6.13 IC8.G1 IC9.2 IC9.4 IC9.9 IC10.B1 IC10.G1 IC11.G1 J2.5 J3.2 R6.1 R15.2 R18.2 T1.1 U1.3 U1.4 U1.6 U1.7 U1.13 | length 83.2
  ASIG w0.2: v1(1,1.7) 1.65,1.7 R6.1 1.5,1.95 C23.1 ; IC2.4 1.988,6.2 2.688,5.5 IC2.9 ; C10_LPF1.1 v1(3.6,20) ; C9_LPF1.1 v1(3.6,26.5) ; IC6.13 IC6.2 3.935,12.495 3.935,13.135 4.3,13.5 ; IC5_LPF1.9 4.25,16.062 4.95,16.762 IC5_LPF1.4 ; IC4_LPF1.9 4.25,23.062 4.95,23.762 IC4_LPF1.4 ; IC3_LPF1.9 4.25,29.062 4.95,29.762 IC3_LPF1.4 ; v1(4.9,19.5) C5_LPF1.1 ; v1(4.9,26.5) C4_LPF1.1 ; v1(7.6,4.5) IC11.G1 v1(9.9,4.5) ; C10_LPF2.1 v1(11.6,20) ; C9_LPF2.1 v1(11.6,26.5) ; v1(11.4,4.5) IC8.G1 v1(13.6,4.5) ; v1(12,9.2) 12.025,9.225 12.725,9.225 C18.2 ; IC5_LPF2.9 12.25,16.062 12.95,16.762 IC5_LPF2.4 ; IC4_LPF2.9 12.25,23.062 12.95,23.762 IC4_LPF2.4 ; IC3_LPF2.9 12.25,29.062 12.95,29.762 IC3_LPF2.4 ; C16.2@12.45,8.3 C16.2 C17.2 13.9,8.1 v1(14.3,8.1) ; v1(12.9,19.5) C5_LPF2.1 ; v1(12.9,26.5) C4_LPF2.1 ; v1(14.3,6.5) IC1.3 ; v1(14.5,10.9) R15.2 ; v1(15.3,1.8) 15.325,1.775 15.975,1.775 C25.2 ; IC1.8 IC1.33@16,4 ; IC1.5 IC1.33@17.5,5.5 ; IC1.4 IC1.33@16.5,6 ; IC1.9 IC1.33@16,4 ; IC1.10 IC1.33@16.5,4.5 ; IC1.11 IC1.33@17,5 ; IC1.33@17,6.5 v1(17.75,5.75) ; IC1.13 18.05,3.25 18.05,2.55 v1(18.1,2.5) 18.1,2.419 18.3,2.219 18.3,1.9 18.45,1.75 C24.2 ; IC1.33@18,6 IC1.21 ; IC1.14 IC1.33@18.5,5 ; IC1.15 IC1.33@19,4.5 ; C24.1 19.525,1.775 20.175,1.775 v1(20.2,1.8) ; IC1.16 IC1.33@19.5,4 ; IC1.25 19.475,8.175 19.475,7.475 v1(17.75,5.75) ; IC1.17 IC1.33@19.5,4 ; IC1.18 IC1.33@19,4.5 ; IC1.19 IC1.33@18.5,5 ; IC1.20 18,5.5 IC1.33@18.5,5 ; IC1.23 v1(21,7) C20.2 ; C22.2 v1(23.5,6) ; C20.1 v1(23.5,7) ; C19.2 v1(23.5,8) ; C15.2 C14.2 v1(23.5,9) ; IC9.4 24.55,10.2 24.55,9.75 25.05,9.25 IC9.9 25.5,9.5 IC9.2 ; v1(28.4,11.7) 28.425,11.725 29.475,11.725 IC10.G1 29.525,11.725 30.575,11.725 v1(30.6,11.7) ; v1(30.1,16) R18.2 ; IC1.33@16,4 IC1.33@16.5,4.5 ; IC1.33@16.5,4.5 IC1.33@17,5 ; IC1.33@17,5 IC1.33@17.5,5.5 ; IC1.33@17.5,5.5 v1(17.75,5.75) ; IC1.33@18.5,5 IC1.33@19,4.5 ; IC1.33@19,4.5 IC1.33@19.5,4
  ASIG w0.35: v1(28.6,12.6) 28.61,12.59 29.49,12.59 IC10.B1
  PWR/DSIG w0.2: v1(4.7,15.8) 4.7,15.25 C8_LPF1.1 ; v1(4.7,22.8) 4.7,22.25 C7_LPF1.1 ; v1(4.7,28.8) 4.7,28.25 C6_LPF1.1 ; v1(8.4,26.1) C30.1 ; v1(12.7,15.8) 12.7,15.25 C8_LPF2.1 ; v1(12.7,22.8) 12.7,22.25 C7_LPF2.1 ; v1(12.7,28.8) 12.7,28.25 C6_LPF2.1 ; J2.5 T1.1
  other v1: 0.6,0.6 1.6,0.6 2.6,0.6 3.6,0.6 4.6,0.6 5.6,0.6 6.6,0.6 7.6,0.6 8.6,0.6 9.6,0.6 10.6,0.6 11.6,0.6 12.6,0.6 13.6,0.6 14.6,0.6 15.6,0.6 16.6,0.6 17.6,0.6 18.6,0.6 19.6,0.6 20.6,0.6 21.6,0.6 22.6,0.6 23.6,0.6 24.6,0.6 25.6,0.6 26.6,0.6 27.6,0.6 28.6,0.6 29.6,0.6 32.6,0.6 33.6,0.6 34.6,0.6 35.6,0.6 36.6,0.6 39.4,0.6 39.4,1.6 0.6,2.4 3.4,2.6 39.4,2.6 33,3 35,3 0.6,3.4 39.4,3.6 28,4 0.6,4.4 17.75,4.5 6.275,4.575 39.4,4.6 2.338,5.05 3.238,5.05 0.6,5.4 39.4,5.6 16.5,5.75 19,5.75 2.338,5.85 3.238,5.85 30,6 0.6,6.4 39.4,6.6 16.5,7 17.75,7 6,7.1 0.6,7.4 10.3,7.6 39.4,7.6 0.6,8.4 39.4,8.6 32,9 24.875,9.075 25.575,9.3 0.6,9.4 39.4,9.6 9.75,9.75 20.5,10 8.8,10.2 0.6,10.4 39.4,10.6 0.6,11.4 39.4,11.6 8.8,11.9 0.6,12.4 15.4,12.5 5.1,12.6 6.5,12.6 39.4,12.6 2.4,12.8 9.6,12.8 26.4,13.2 0.6,13.4 35.7,13.6 36.7,13.6 37.7,13.6 39.4,13.6 13,13.7 11.3,13.8 5.6,14.1 9.5,14.1 17.3,14.3 35.2,14.3 0.6,14.4 2.1,14.6 39.4,14.6 30.1,15.2 31.1,15.2 33.7,15.2 34.7,15.2 0.6,15.4 20.2,16.2 21.2,16.2 22.2,16.2 23.2,16.2 29.4,16.2 39.4,16.2 19.2,16.3 0.6,16.4 8.5,16.4 3.8,16.6 4.7,16.6 11.8,16.6 12.7,16.6 0.6,17.4 4,17.5 5.4,17.5 12,17.5 13.4,17.5 17.5,18.1 21.6,18.3 22.6,18.3 23.6,18.3 24.6,18.3 25.6,18.3 30.6,18.3 31.6,18.3 33.7,18.3 36.6,18.3 37.6,18.3 38.6,18.3 39.4,18.3 0.6,18.4 20.8,18.4 16.8,18.8 39.4,19.3 0.6,19.4 16.5,19.4 19.4,19.7 39.4,20.3 0.6,20.4 16.5,20.4 18.7,20.4 39.4,21.3 5.409,21.35 0.6,21.4 13.5,21.4 16.5,21.4 18.6,21.4 39.4,22.3 0.6,22.4 16.5,22.4 18.6,22.4 8.1,22.6 39.4,23.3 0.6,23.4 16.5,23.4 18.6,23.4 3.8,23.6 4.7,23.6 11.8,23.6 12.7,23.6 39.4,24.3 0.6,24.4 16.5,24.4 18.6,24.4 4,24.5 5.4,24.5 12,24.5 13.4,24.5 39.4,25.3 0.6,25.4 16.5,25.4 18.6,25.4 23,26 25,26 39.4,26.3 0.6,26.4 16.5,26.4 18.6,26.4 28,27 39.4,27.3 0.6,27.4 16.5,27.4 18.6,27.4 23,28 39.4,28.3 0.6,28.4 16.5,28.4 18.6,28.4 26,29 28,29 39.4,29.3 0.6,29.4 16.5,29.4 18.6,29.4 3.8,29.6 4.7,29.6 11.8,29.6 12.7,29.6 7,29.8 23,30 39.4,30.3 0.6,30.4 16.5,30.4 18.6,30.4 24,31 27,31 39.4,31.3 0.6,31.4 16.5,31.4 18.6,31.4 39.4,32.3 0.6,32.4 16.5,32.4 18.6,32.4 24,33 28,33 39.4,33.3 0.6,33.4 16.5,33.4 18.6,33.4 5,33.5 7.5,33.5 10,33.5 12.5,33.5 39.4,34.3 0.6,34.4 16.5,34.4 18.6,34.4 23.9,35.2 24.9,35.2 25.9,35.2 26.9,35.2 27.9,35.2 28.9,35.2 29.9,35.2 30.9,35.2 31.9,35.2 39.4,35.3 0.6,35.4 16.5,35.4 18.6,35.4 23,35.4 32.6,35.6 24.4,35.7 25.4,35.7 26.4,35.7 27.4,35.7 28.4,35.7 29.4,35.7 30.4,35.7 31.4,35.7 22.7,36.2 32.3,36.3 39.4,36.3 0.6,36.4 16.5,36.4 18.6,36.4 33,36.6 32.3,37 22.75,37.275 39.4,37.3 0.6,37.4 16.5,37.4 18.6,37.4 32.9,37.5 32.3,38 39.4,38.3 0.6,38.4 16.5,38.4 18.6,38.4 22.725,38.4 32.9,38.6 0.6,39.4 1.6,39.4 2.6,39.4 3.6,39.4 4.6,39.4 5.6,39.4 6.6,39.4 7.6,39.4 8.6,39.4 9.6,39.4 10.6,39.4 11.6,39.4 12.6,39.4 13.6,39.4 14.6,39.4 15.6,39.4 16.5,39.4 18.6,39.4 19.6,39.4 20.6,39.4 21.6,39.4 22.6,39.4 32.6,39.4 33.4,39.4 34.4,39.4 35.4,39.4 36.4,39.4 37.4,39.4 38.4,39.4 39.4,39.4
lpf_in_p11: IC3_LPF1.5 J2.1 R1.2 T2.1 | length 9.4
  ASIG w0.2: IC3_LPF1.5 2.98,29.762 3.032,29.814 3.032,32.101 3.42,32.488 J2.1
  PWR/DSIG w0.2: J2.1 3.5,35.42 T2.1 R1.2
lpf_in_p12: IC3_LPF2.5 J2.3 R3.2 | length 10
  ASIG w0.2: J2.3 8.5,31.734 10.472,29.762 IC3_LPF2.5
  PWR/DSIG w0.2: R3.2 J2.3
lpf_in_p21: IC3_LPF1.3 J2.2 R2.2 | length 10.2
  ASIG w0.2: IC3_LPF1.3 5.826,29.306 6.301,29.306 6.48,29.485 6.48,32.036 5.96,32.557 J2.2
  PWR/DSIG w0.2: J2.2 5.96,32.34 R2.2
lpf_in_p22: IC3_LPF2.3 J2.4 R4.2 | length 11.5
  ASIG w0.2: J2.4 11.04,34.017 14.48,30.576 14.48,29.485 14.301,29.306 13.826,29.306 IC3_LPF2.3
  PWR/DSIG w0.2: R4.2 11.04,32.34 J2.4
NetC2_LPF1_1: C2_LPF1.1 R7_LPF1.1 R8_LPF1.2 | length 4.4
  ASIG w0.2: C2_LPF1.1 7.25,25.774 6.924,26.1 6.9,26.1 6.5,26.5 R8_LPF1.2 6.5,26.6 6.7,26.8 6.75,26.8 7.25,27.3 R7_LPF1.1
NetC2_LPF1_2: C2_LPF1.2 IC4_LPF1.1 IC4_LPF1.2 R9_LPF1.2 | length 3.1
  ASIG w0.2: IC4_LPF1.2 IC4_LPF1.1 6.812,22.238 R9_LPF1.2 7,22.1 7.25,22.35 C2_LPF1.2
NetC2_LPF2_1: C2_LPF2.1 R7_LPF2.1 R8_LPF2.2 | length 4.4
  ASIG w0.2: C2_LPF2.1 15.25,25.774 14.924,26.1 14.9,26.1 14.5,26.5 R8_LPF2.2 14.5,26.6 14.7,26.8 14.75,26.8 15.25,27.3 R7_LPF2.1
NetC2_LPF2_2: C2_LPF2.2 IC4_LPF2.1 IC4_LPF2.2 R9_LPF2.2 | length 3.1
  ASIG w0.2: IC4_LPF2.2 IC4_LPF2.1 14.812,22.238 R9_LPF2.2 15,22.1 15.25,22.35 C2_LPF2.2
NetC3_LPF1_1: C3_LPF1.1 R9_LPF1.1 R10_LPF1.2 | length 4.2
  ASIG w0.2: R9_LPF1.1 7,20.1 6.5,19.6 R10_LPF1.2 6.5,19.5 6.9,19.1 6.924,19.1 7.25,18.774 C3_LPF1.1
NetC3_LPF2_1: C3_LPF2.1 R9_LPF2.1 R10_LPF2.2 | length 4.2
  ASIG w0.2: R9_LPF2.1 15,20.1 14.5,19.6 R10_LPF2.2 14.5,19.5 14.9,19.1 14.924,19.1 15.25,18.774 C3_LPF2.1
NetC4_LPF1_2: C4_LPF1.2 IC4_LPF1.3 R8_LPF1.1 | length 3.8
  ASIG w0.2: C4_LPF1.2 5.55,25.45 R8_LPF1.1 6.5,23.505 6.301,23.306 5.826,23.306 IC4_LPF1.3
NetC4_LPF2_2: C4_LPF2.2 IC4_LPF2.3 R8_LPF2.1 | length 3.8
  ASIG w0.2: C4_LPF2.2 13.55,25.45 R8_LPF2.1 14.5,23.505 14.301,23.306 13.826,23.306 IC4_LPF2.3
NetC5_LPF1_2: C5_LPF1.2 IC5_LPF1.3 R10_LPF1.1 | length 3.8
  ASIG w0.2: C5_LPF1.2 5.55,18.45 R10_LPF1.1 6.5,16.505 6.301,16.306 5.826,16.306 IC5_LPF1.3
NetC5_LPF2_2: C5_LPF2.2 IC5_LPF2.3 R10_LPF2.1 | length 3.8
  ASIG w0.2: C5_LPF2.2 13.55,18.45 R10_LPF2.1 14.5,16.505 14.301,16.306 13.826,16.306 IC5_LPF2.3
NetC9_LPF1_2: C9_LPF1.2 IC4_LPF1.5 R12_LPF1.1 | length 3.2
  ASIG w0.2: R12_LPF1.1 2.576,25.95 2.826,25.7 2.85,25.7 3,25.55 C9_LPF1.2 3,23.814 2.948,23.762 IC4_LPF1.5
NetC9_LPF2_2: C9_LPF2.2 IC4_LPF2.5 R12_LPF2.1 | length 3.2
  ASIG w0.2: R12_LPF2.1 10.576,25.95 10.826,25.7 10.85,25.7 11,25.55 C9_LPF2.2 11,23.814 10.948,23.762 IC4_LPF2.5
NetC10_LPF1_2: C10_LPF1.2 IC5_LPF1.5 R14_LPF1.1 | length 3.5
  ASIG w0.2: R14_LPF1.1 2.95,18.95 C10_LPF1.2 3,16.814 2.948,16.762 IC5_LPF1.5
NetC10_LPF2_2: C10_LPF2.2 IC5_LPF2.5 R14_LPF2.1 | length 3.5
  ASIG w0.2: R14_LPF2.1 10.95,18.95 C10_LPF2.2 11,16.814 10.948,16.762 IC5_LPF2.5
NetC11_LPF1_1: C11_LPF1.1 R11_LPF1.1 R12_LPF1.2 | length 4.2
  ASIG w0.2: C11_LPF1.1 1.5,25.376 1.4,25.476 1.4,26.424 1.576,26.6 1.6,26.6 2,27 R12_LPF1.2 2,27.1 1.5,27.6 R11_LPF1.1
NetC11_LPF1_2: C11_LPF1.2 IC4_LPF1.6 IC4_LPF1.7 R13_LPF1.2 | length 3
  ASIG w0.2: C11_LPF1.2 R13_LPF1.2 1.696,22.746 IC4_LPF1.7 IC4_LPF1.6
NetC11_LPF2_1: C11_LPF2.1 R11_LPF2.1 R12_LPF2.2 | length 4.2
  ASIG w0.2: C11_LPF2.1 9.5,25.376 9.4,25.476 9.4,26.424 9.576,26.6 9.6,26.6 10,27 R12_LPF2.2 10,27.1 9.5,27.6 R11_LPF2.1
NetC11_LPF2_2: C11_LPF2.2 IC4_LPF2.6 IC4_LPF2.7 R13_LPF2.2 | length 3
  ASIG w0.2: C11_LPF2.2 R13_LPF2.2 9.696,22.746 IC4_LPF2.7 IC4_LPF2.6
NetC12_LPF1_1: C12_LPF1.1 R13_LPF1.1 R14_LPF1.2 | length 4.2
  ASIG w0.2: C12_LPF1.1 1.4,17.85 1.4,19.424 1.576,19.6 1.6,19.6 2,20 R14_LPF1.2 2,20.1 1.5,20.6 R13_LPF1.1
NetC12_LPF2_1: C12_LPF2.1 R13_LPF2.1 R14_LPF2.2 | length 4.2
  ASIG w0.2: C12_LPF2.1 9.4,17.85 9.4,19.424 9.576,19.6 9.6,19.6 10,20 R14_LPF2.2 10,20.1 9.5,20.6 R13_LPF2.1
NetC18_1: C18.1 IC1.1 | length 2.7
  ASIG w0.2: C18.1 13.887,9.113 14.187,9.113 14.975,8.325 14.975,7.55 15.025,7.5 IC1.1
NetC19_1: C19.1 IC1.24 | length 1.8
  ASIG w0.2: IC1.24 20.475,7.5 20.975,8 C19.1
NetC22_1: C22.1 IC1.22 | length 1.8
  ASIG w0.2: IC1.22 20.25,6.45 20.75,6.45 21.2,6 C22.1
NetC27_2: C27.2 IC9.7 | length 1.5
  ASIG w0.2: C27.2 IC9.7
NetC29_1: C29.1 IC9.1 IC9.3 IC10.A1 J3.1 T16.1 | length 0.1
  ASIG w0.2: IC9.3 IC9.3@25.05,10.3
NetIC1_27: IC1.27 T11.1 U1.5 | length 34
  ASIG w0.2: IC1.27 18.55,8.25 18.55,9.122 v1(18.6,9.172) ; v1@18.55,9.172 19.325,9.947 19.325,13.975 v1(20.1,14.75)
  PWR/DSIG w0.2: v1(20.1,14.75) 21.9,14.75 23.45,14.75 29.2,20.5 29.2,24.51 21.46,32.25 U1.5
NetIC1_28: IC1.28 T13.1 U1.10 | length 42.7
  ASIG w0.2: v1(17.489,10.004) 18.05,9.444 18.05,8.25 IC1.28
  PWR/DSIG w0.2: v1(17.489,10.004) 17.489,11.624 18.766,12.9 T13.1 23.297,12.9 30.411,20.014 30.411,25.786 30.612,25.988 30.683,26.058 ccw(c30.433,26.309) 30.683,26.559 30.661,26.581 cw(c30.912,26.831) 30.661,27.081 cw(c30.912,26.831) 31.162,27.081 31.635,26.608 ccw(c31.885,26.859) 32.136,26.608 ccw(c31.885,26.859) 32.136,27.109 31.649,27.595 cw(c31.899,27.846) 31.649,28.096 cw(c31.899,27.846) 32.15,28.096 32.636,27.61 ccw(c32.887,27.86) 33.137,27.61 ccw(c32.887,27.86) 33.137,28.11 32.676,28.572 cw(c32.926,28.822) 32.676,29.072 cw(c32.926,28.822) 33.176,29.072 33.638,28.611 ccw(c33.888,28.861) 34.138,28.611 ccw(c33.888,28.861) 34.138,29.111 33.652,29.598 cw(c33.902,29.848) 33.652,30.099 cw(c33.902,29.848) 34.152,30.099 34.188,30.063 ccw(c34.438,30.314) 34.688,30.063 35.062,30.438 36.875,32.25 U1.10
NetIC1_29: IC1.29 T12.1 U1.11 | length 40.4
  ASIG w0.2: v1(17.5,9) IC1.29 IC1.29@17.55,8.25
  PWR/DSIG w0.2: v1(17.5,9) 18.492,9.992 18.492,11.392 19.3,12.2 T12.1 23.163,12.2 30.811,19.848 30.811,23.646 31.032,23.868 31.103,23.938 ccw(c30.853,24.189) 31.103,24.439 31.068,24.474 cw(c31.318,24.725) 31.068,24.975 cw(c31.318,24.725) 31.568,24.975 32.14,24.404 ccw(c32.39,24.654) 32.64,24.404 ccw(c32.39,24.654) 32.64,24.904 32.069,25.475 cw(c32.319,25.726) 32.069,25.976 cw(c32.319,25.726) 32.57,25.976 33.141,25.405 ccw(c33.391,25.655) 33.642,25.405 ccw(c33.391,25.655) 33.642,25.905 33.07,26.477 cw(c33.321,26.727) 33.07,26.977 cw(c33.321,26.727) 33.571,26.977 34.142,26.406 ccw(c34.393,26.656) 34.643,26.406 ccw(c34.393,26.656) 34.643,26.907 34.072,27.478 cw(c34.322,27.728) 34.072,27.979 cw(c34.322,27.728) 34.572,27.979 34.608,27.943 ccw(c34.858,28.194) 35.108,27.943 35.732,28.568 36.875,29.71 U1.11
NetIC1_30: IC1.30 T14.1 U1.9 | length 41
  ASIG w0.2: IC1.30 16.95,8.25 16.95,9.45 v1(17,9.5)
  PWR/DSIG w0.2: v1(17,9.5) 16.943,9.557 16.943,9.773 16.939,9.776 16.939,11.639 18.9,13.6 T14.1 23.431,13.6 30.011,20.18 30.011,27.926 30.592,28.508 30.663,28.578 ccw(c30.413,28.829) 30.663,29.079 30.628,29.114 cw(c30.878,29.365) 30.628,29.615 cw(c30.878,29.365) 31.128,29.615 31.64,29.103 ccw(c31.891,29.353) 32.141,29.103 ccw(c31.891,29.353) 32.141,29.604 31.664,30.08 cw(c31.915,30.33) 31.664,30.581 cw(c31.915,30.33) 32.165,30.581 ccw(c32.415,30.831) 32.666,30.581 33.792,31.708 36.875,34.79 U1.9
NetIC1_31: IC1.31 R15.1 | length 2.7
  ASIG w0.2: R15.1 16.45,9.272 16.5,9.222 IC1.31
NetIC1_32: IC1.32 T15.1 U1.8 | length 41.1
  ASIG w0.2: v1(15.921,9.121) 15.961,9.081 15.961,8.239 IC1.32
  PWR/DSIG w0.2: v1(15.921,9.121) 15.977,9.176 15.977,11.677 18.5,14.2 T15.1 23.466,14.2 29.6,20.334 29.6,30.055 36.875,37.33 U1.8
NetIC3_LPF1_1: IC3_LPF1.1 IC3_LPF1.2 R7_LPF1.2 | length 2.1
  ASIG w0.2: IC3_LPF1.1 IC3_LPF1.2 6.996,28.746 7.25,29 R7_LPF1.2
NetIC3_LPF1_6: IC3_LPF1.6 IC3_LPF1.7 R11_LPF1.2 | length 1.9
  ASIG w0.2: R11_LPF1.2 1.5,29.5 1.7,29.3 2.68,29.3 IC3_LPF1.6 IC3_LPF1.7
NetIC3_LPF2_1: IC3_LPF2.1 IC3_LPF2.2 R7_LPF2.2 | length 2.1
  ASIG w0.2: IC3_LPF2.1 IC3_LPF2.2 14.996,28.746 15.25,29 R7_LPF2.2
NetIC3_LPF2_6: IC3_LPF2.6 IC3_LPF2.7 R11_LPF2.2 | length 1.9
  ASIG w0.2: R11_LPF2.2 9.5,29.5 9.7,29.3 10.68,29.3 IC3_LPF2.6 IC3_LPF2.7
NetIC6_10: IC6.10 T8.1 U1.2 | length 26.2
  ASIG w0.2: IC6.10 7.1,10.6 7.2,10.7 v1(9.3,10.7)
  PWR/DSIG w0.2: v1(9.3,10.7) T8.1 12.201,10.7 22.76,21.259 22.76,23.33 21.46,24.63 U1.2
NetIC6_12: IC6.12 T7.1 U1.1 | length 21.5
  ASIG w0.2: IC6.12 7,11.6 7.2,11.4 v1(9.3,11.4)
  PWR/DSIG w0.2: v1(9.3,11.4) T7.1 12.336,11.4 20.75,19.814 20.75,21.755 U1.1
NetR18_1: R18.1 S1.1 | length 3.5
  ASIG w0.35: R18.1 S1.1
NetS1_3: S1.3 U1.12 | length 9.7
  ASIG w0.35: v1(34,20.5) S1.3
  PWR/DSIG w0.35: v1(34,20.5) 34,24.295 36.875,27.17 U1.12
out_11: C12_LPF1.2 IC5_LPF1.6 IC5_LPF1.7 IC6.7 T3.1 | length 11.9
  ASIG w0.2: C12_LPF1.2 T3.1 ; IC5_LPF1.6 IC5_LPF1.7 2.724,15.748 1.502,15.748 T3.1 ; IC6.7 3.4,9.2 3.2,9 2.122,9 1.25,9.872 1.25,13.696 1.5,13.946 T3.1
out_12: C12_LPF2.2 IC5_LPF2.6 IC5_LPF2.7 IC6.1 | length 9.5
  ASIG w0.2: IC6.1 4.4,12.83 4.866,13.296 4.866,13.3 6.349,13.3 8.795,15.746 9.375,15.746 ; C12_LPF2.2 9.5,15.871 9.375,15.746 ; IC5_LPF2.6 IC5_LPF2.7 9.375,15.746
out_21: C3_LPF1.2 IC5_LPF1.1 IC5_LPF1.2 IC6.3 | length 7.1
  ASIG w0.2: IC6.3 3.4,13.575 3.968,14.143 4.557,14.143 5.35,14.936 5.35,15.068 5.52,15.238 IC5_LPF1.1 ; IC5_LPF1.2@5.826,15.798 IC5_LPF1.2 IC5_LPF1.1 ; C3_LPF1.2 7.25,15.65 6.838,15.238 IC5_LPF1.1
out_22: C3_LPF2.2 IC5_LPF2.1 IC5_LPF2.2 IC6.9 | length 16.8
  ASIG w0.2: IC6.9 4.4,9.37 4.67,9.1 10.1,9.1 10.75,9.75 10.75,12.25 13.35,14.85 13.35,15.068 13.52,15.238 IC5_LPF2.1 ; IC5_LPF2.2@13.826,15.798 IC5_LPF2.2 IC5_LPF2.1 ; C3_LPF2.2 15.25,15.65 14.838,15.238 IC5_LPF2.1
Vbuff_1_N: IC1.7 IC8.B1 IC11.B1 R17.1 T6.1 | length 9.5
  ASIG w0.2: R17.1 T6.1 7.599,3.5 7.974,3.875 13.875,3.875 14.5,4.5 IC1.7 IC1.7@15.25,4.45
Vbuff_1_P: IC1.6 IC8.A1 IC11.A1 R16.1 T5.1 | length 9.2
  ASIG w0.2: R16.1 T5.1 7.599,5.5 7.974,5.125 13.314,5.125 13.439,5 IC1.6
Vbuff_N: IC2.6 IC2.7 R17.2 | length 3.4
  ASIG w0.2: IC2.6 IC2.7 3.056,3.924 3.056,3.449 3.235,3.27 3.977,3.27 4.208,3.5 R17.2
Vbuff_P: IC2.1 IC2.2 R16.2 | length 3
  ASIG w0.2: IC2.2 IC2.1 3.512,6.77 3.564,6.718 3.932,6.718 5.15,5.5 R16.2
Vin_N: C23.2 IC2.5 R5.1 R6.2 T4.1 | length 5
  ASIG w0.2: IC2.5 1.988,3.27 2.1,3.158 2.1,3.1 2.45,2.75 C23.2 2.55,2.75 2.7,2.6 2.7,2.55 2.8,2.45 R6.2 T4.1 R5.1
Vin_P: IC2.3 IC6.8 | length 3.1
  ASIG w0.2: IC2.3 2.548,7.076 2.548,7.444 2.552,7.448 2.552,7.555 2.727,7.73 3.202,7.73 3.9,8.428 IC6.8@3.9,9.25
pads on no net: IC6.5 IC6.11 IC9.5 J3.3 J3.4 S1.MH1 S1.MH2 S1.MP1 S1.MP2 S1.MP3 S1.MP4 U1.14

## Polygon pours and split planes (outlines as drawn)
GND on ASIG "GND_L01_P010" (solid, pour order 10): 0,40 16.75,40 16.75,19.25 19.5,16.5 40.015,16.5 40.015,0.015 40,0 0,0
NetC29_1 on ASIG "NetC29_1_L01_P004" (solid, remove dead copper, pour order 6): 24.85,11.2 24.85,9.875 25.15,9.875 25.15,10.825 25.85,10.825 25.85,10.625 25.85,9.9 28.3,9.9 29,10.6 30,10.6 31,9.6 32.9,9.6 32.9,6 34,6 34,10.6 33,11.6 32,11.6 31.6,11.2
3V3 on ASIG "3V3_L01_P005" (solid, remove dead copper, pour order 5): 27,3.375 25.375,1.75 21.25,1.75 21.25,4.25 22.25,5.25 24,5.25 24,6.825 24.85,7.675 24.85,8.625 25.15,8.625 25.15,7.387 24.825,7.062 24.825,6.475 25.25,6.05 25.75,6.05 26.2,6.5 26.2,7 25.85,7.35 25.85,8.625 26.15,8.625 26.15,7.6 26.475,7.275 26.75,7.55 26.75,9 27.25,9.5 29.5,9.5 30,9 30,7.75 29.75,7.5 27.3,7.5 26.8,7 26.8,6.375 27,6.175
GND on ASIG "GND_L01_P003" (solid, remove dead copper, pour order 3): 35.9,12.9 35.9,6 34.8,6 34.8,10.1 33,11.9 32,11.9 31.6,12.3 29.1,12.3 29.1,12.9 31.7,12.9
GND on ASIG "GND_L01_P009" (solid, remove dead copper, pour order 9): 18.25,40 18.25,20.5 20.75,18 40,18 40,40
GND on PWR/DSIG "GND_L04_P013" (solid, pour order 13): 0,40 16.75,40 16.75,19.25 19.5,16.5 40.015,16.5 40.015,0.015 40,0 0,0
GND on PWR/DSIG "GND_L04_P008" (solid, remove dead copper, pour order 8): 18.25,40 18.25,20.5 20.75,18 40,18 40,40
3V3 on PWR/DSIG "3V3_L04_P012" (solid, remove dead copper, pour order 12): 27.25,9.5 29.5,9.5 30,9 30,7.75 29.75,7.5 27.25,7.5 26.75,8 26.75,9
3V3 on PWR/DSIG "3V3_L04_P011" (solid, remove dead copper, pour order 11): 22.25,5.25 21.25,4.25 21.25,1.75 25.5,1.75 25.5,4.5 24.75,5.25
GND on GND1 "GND_L02_P000" (solid, remove dead copper, pour order 0): 0,0 40,0 40,40 0,40
GND on GND2 "GND_L03_P001" (solid, remove dead copper, pour order 1): 0,0 40,0 40,40 0,40

## Keep-outs
Keep-Out Layer:
  the board outline again, w0.254

## Other copper
ASIG:
  pour cut-out: 10,10.25 9.55,9.8 4.7,9.8 4.7,12.3 9.45,12.3 10,11.75
  pour cut-out: 15.65,8.755 15.35,9.055 15.35,11.35 15.5,11.5 18.25,11.5 18.25,14.25 19.5,15.5 21.25,15.5 21.25,14 20.25,13 20.25,9.25
  pour cut-out: 36.2,5.8 34,5.8 34,10.6 33,11.6 32,11.6 31.6,11.2 31.5,11.3 28.9,11.3 28.855,12.205 29,12.3 31.6,12.3 32,11.9 33,11.9 34.8,10.1 34.8,6 35.9,6 35.9,12.9 28.855,12.9 28.855,13.2 36.2,13.2
  pour cut-out: 23,40 23,36 32,36 32,40
GND1:
  pour cut-out: 23,40 23,36 32,36 32,40
GND2:
  pour cut-out: 23,40 23,36 32,36 32,40
PWR/DSIG:
  pour cut-out: 31.117,23.519 30.481,23.519 28.5,25.5 28.5,30.661 35.739,37.9 35.9,37.9 35.9,26.5 34.2,24.8 34.2,23.5 31.136,23.5
  pour cut-out: 18.25,18.5 12,12.25 9.75,12.25 9.75,9.75 12.5,9.75 14,11.25 15,11.25 15,8.5 15.5,8 19.25,8 19.75,8.5 19.75,10.5 23.25,10.5 29.75,17 24.5,17 23,15.5 19,15.5 15.75,12.25 14.75,12.25 19.75,17.25
  pour cut-out: 23,40 23,36 32,36 32,40

## Silkscreen, mask and mechanical layers (free items; w line width, h text height)
Top Overlay:
  lines w0.5: 26.2,19 26.2,20.9 ; 32.8,19 32.8,20.9
  text "WISP [Ver 0.61]" at 18.9,23.7 h2
  text "Battery" at 26.8,20.2 h1
  text "DVDD =>" at 21.9,19.7 h1
  text "USB POWER" at 26.7,18.7 h1
  text "-" at 35,11.2 h3
  text "+" at 32.9,11 h3